# EAGLE board civ_if1 (EAGLE 7.7.0), part 1 of 2
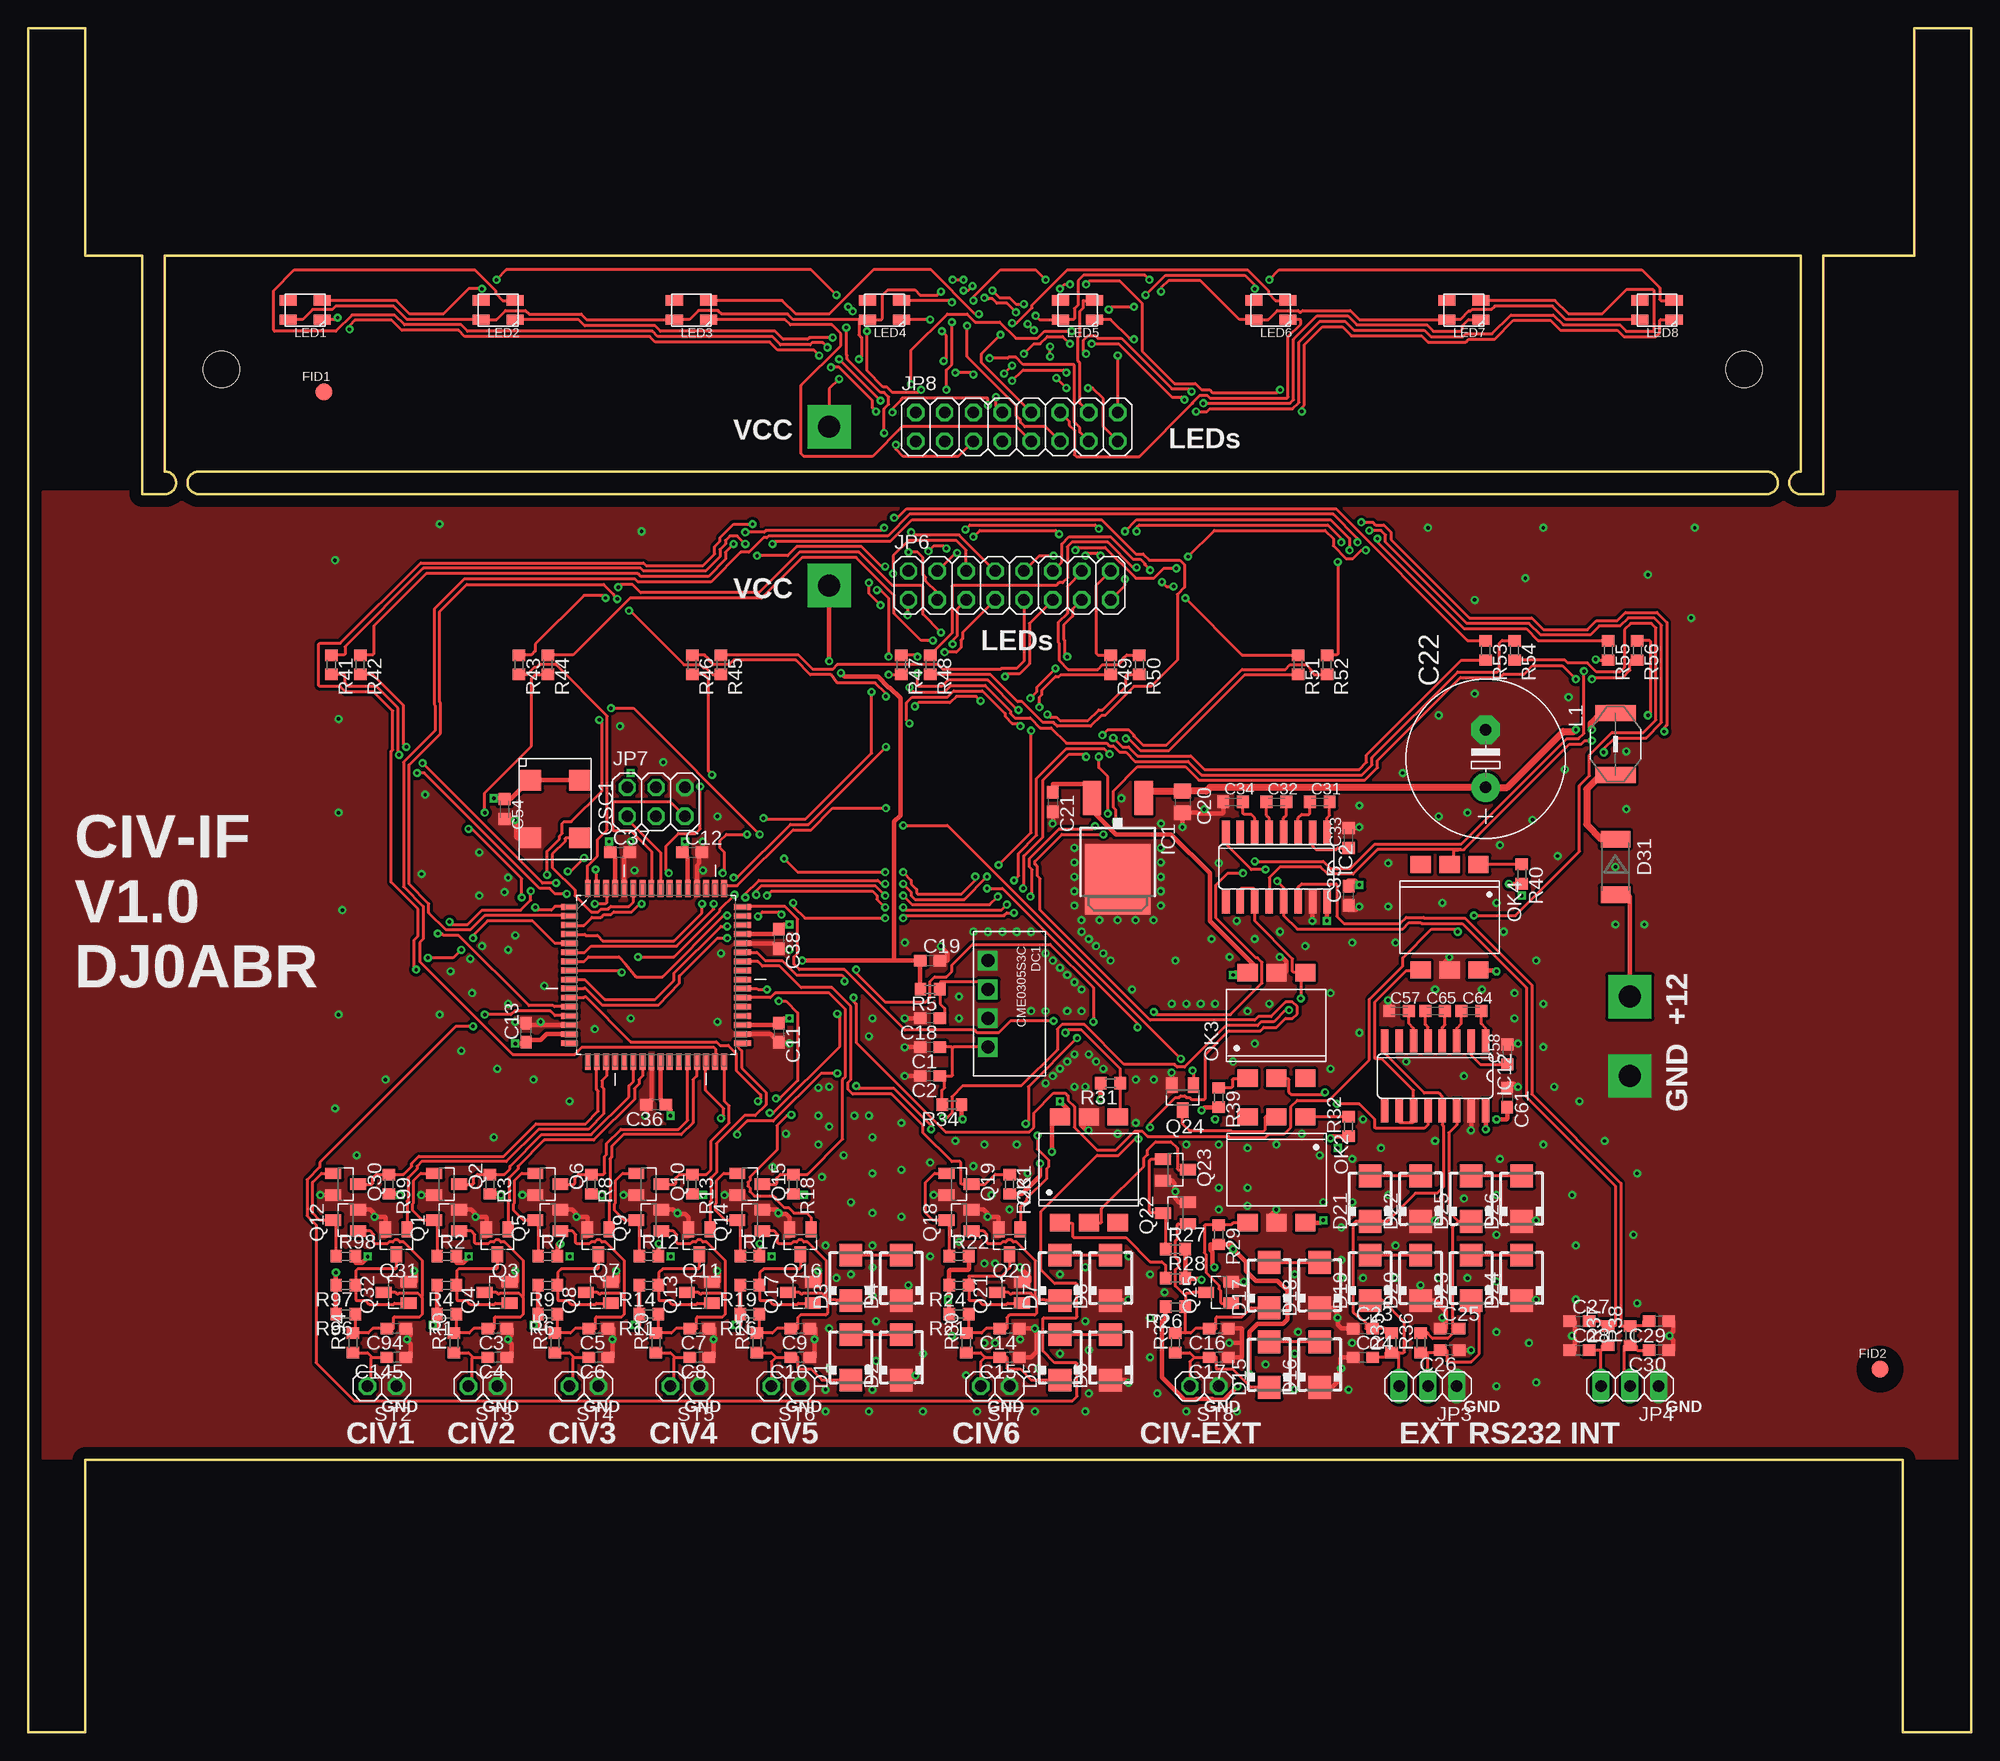
[diagram p0: board, top side]
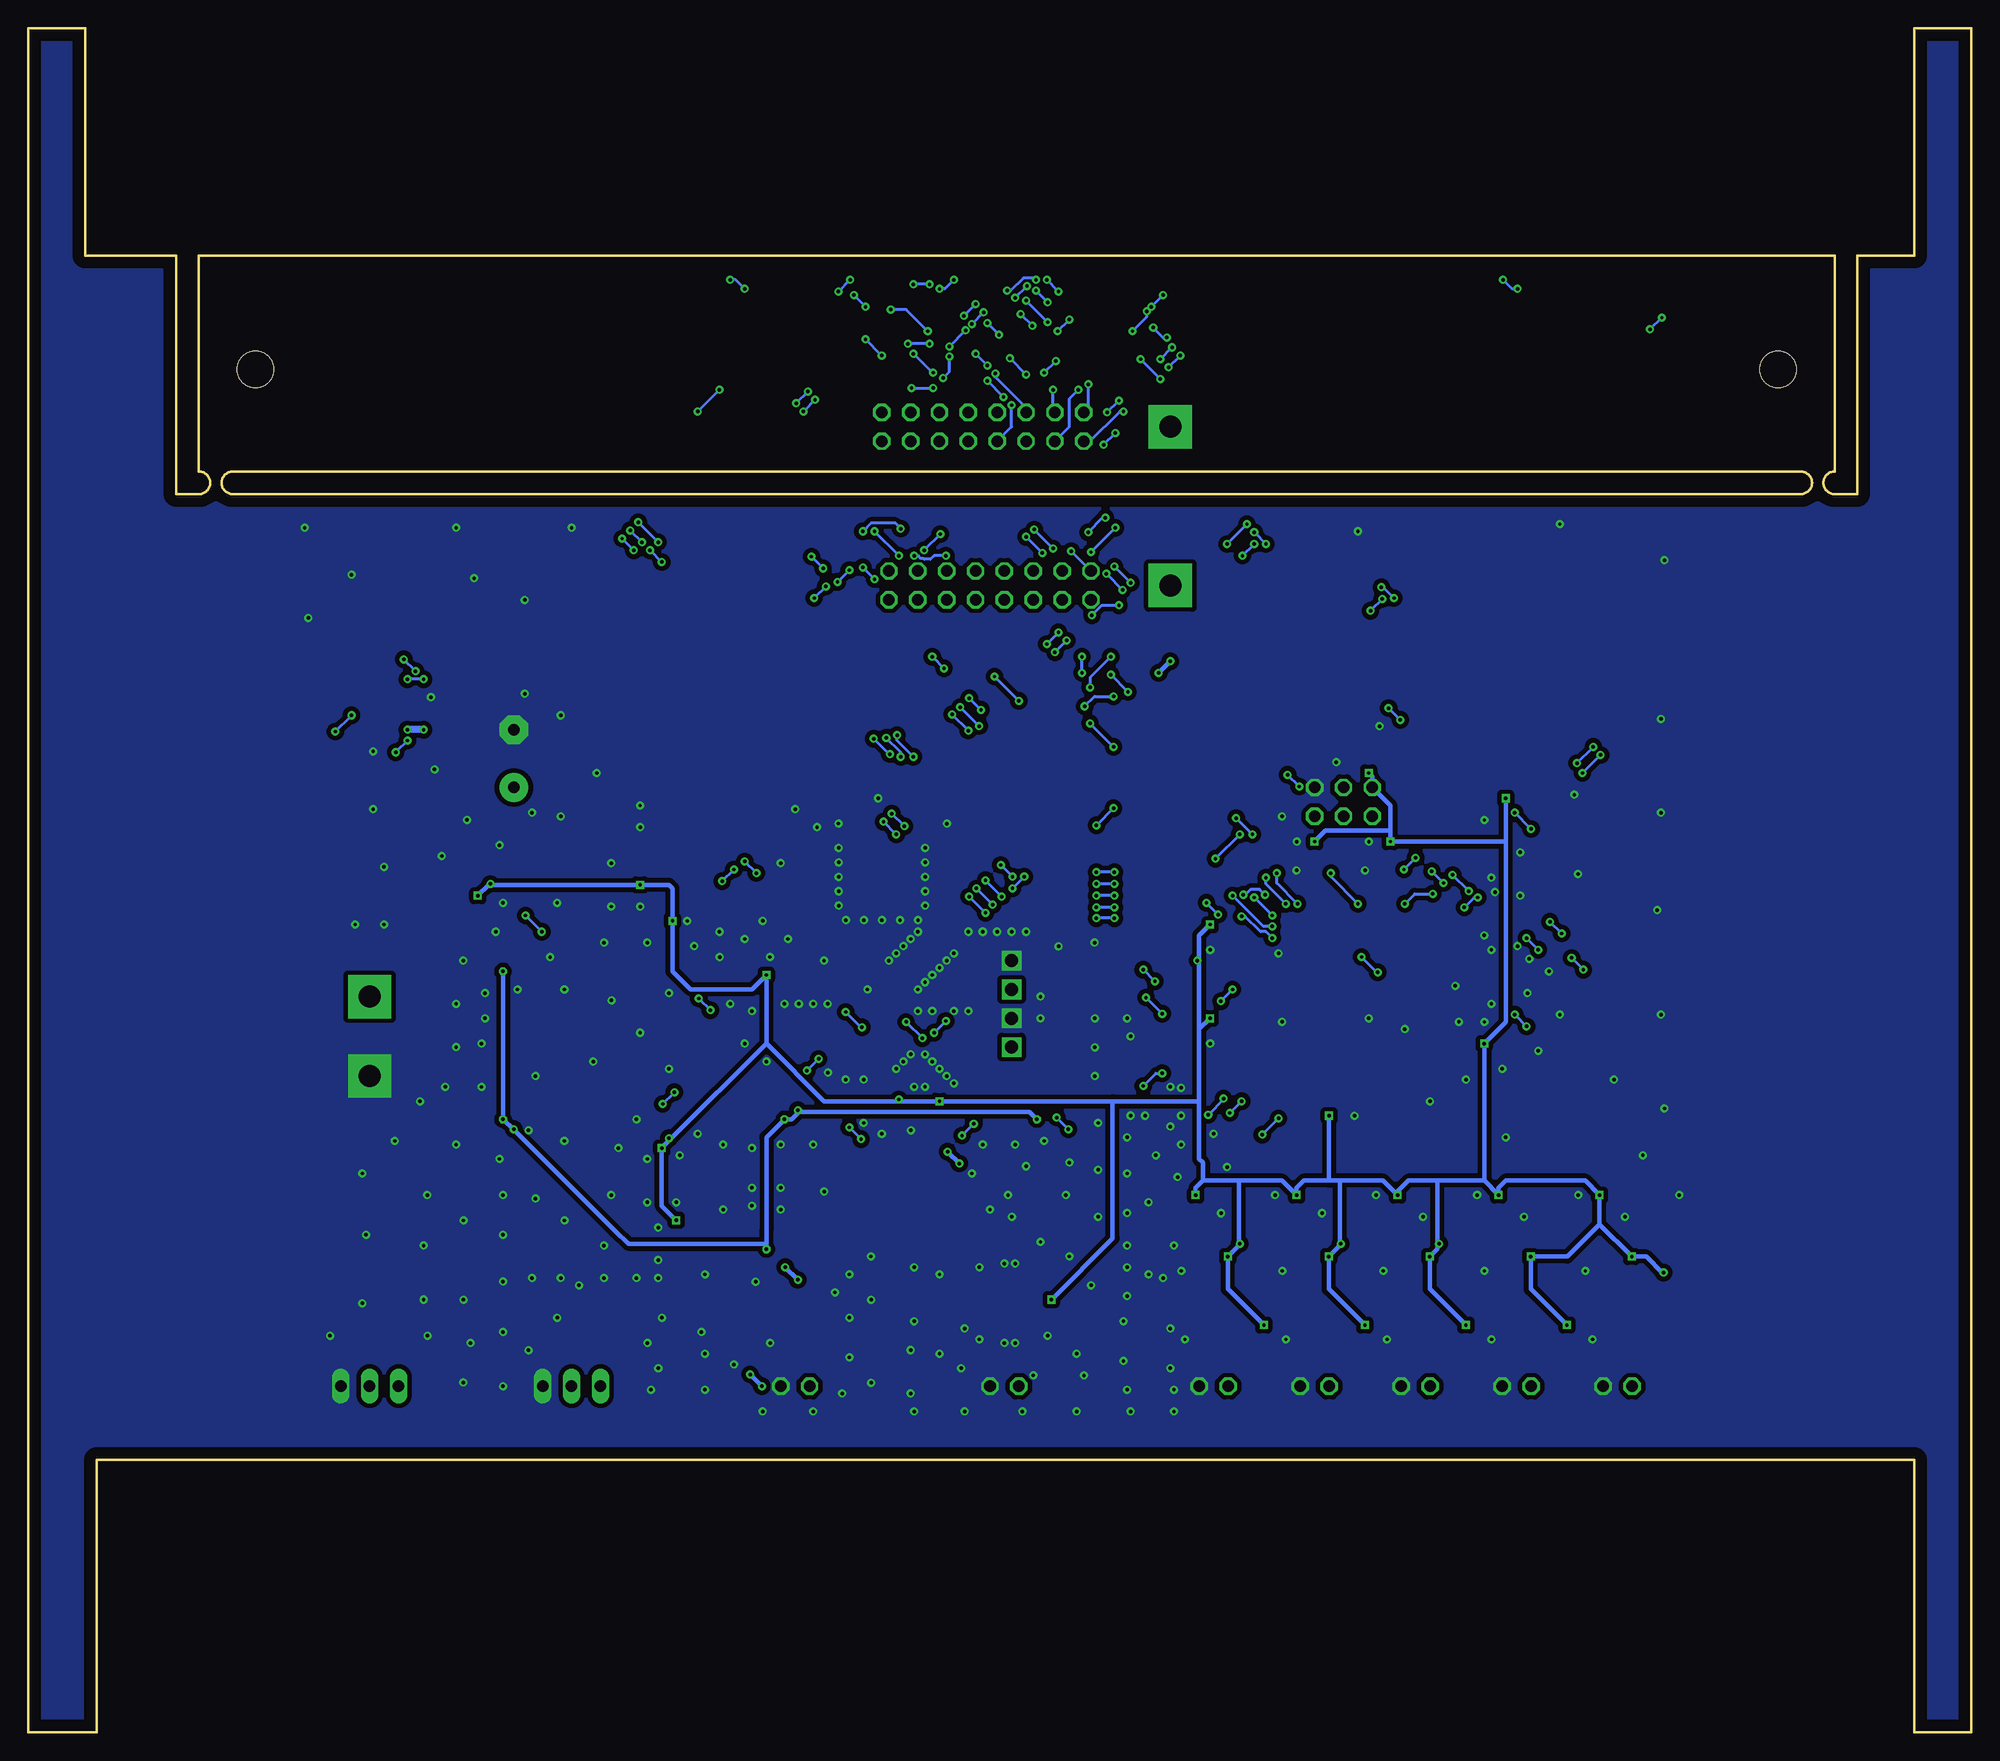
[diagram p1: board, bottom side, seen from below]

Size 171 x 150 mm. Coordinates in mm from the lower left corner, seen from the top.
Outline: 0,0 5,0 5,24 165,24 165,0 171,0 171,150 166,150 166,130 158,130 158,109 156,109 arc-180 156,111 156,130 12,130 12,111 arc-180 12,109 10,109 10,130 5,130 5,150 0,150 0,0
Outline: 153,111 15,111 arc180 15,109 153,109 arc180 153,111
Copper layers (1*16): Top 0.035mm / dielectric 1.5mm / Bottom 0.035mm
Design rules "default *": minimum track width 10mil, minimum drill 0.3mm, track to track 8mil, track to pad 8mil, pad to pad 8mil, via to via 8mil, smd to smd 0mil, copper to edge 40mil, drill to drill 8mil, minimum pad ring 10mil, minimum via ring 8mil, stop-mask expansion 4mil, vias tented up to drill 0.31mm, thermal gap 10mil
Net classes: 1 Supply: width 0.406 mm, drill 0.3 mm; 2 v12: width 0.61 mm, drill 0.3 mm
Holes 3.2 mm at 17,120 151,120

## Footprints (pad centres in the part's own frame; a part is rotated, then mirrored left to right if it is on the bottom)
C0603 = smd 1.1 x 1: 1 -0.85,0; 2 0.85,0
C0805 = smd 1.3 x 1.5: 1 -0.95,0; 2 0.95,0
E5-13 = drill 1.016 pad 2.54: + -2.54,0 | drill 1.016 pad 2.54 octagon: - 2.54,0
C0603K = smd 1.05 x 1.08: 1 -0.875,0; 2 0.875,0
SMA = smd 2 x 2: A 2,0; C -2,0
MELF = smd 1.45 x 2.6: 1 -2.445,0; 2 2.445,0
MURATA_DCDC = drill 1.15 square: 1 -3.81,0; 2 -1.27,0; 3 1.27,0; 4 3.81,0
FIDUCIAL = smd 1.5 x 1.5: P$1 0,0
DPACK = smd 1.6 x 3: 1 -2.28,-4.8; 3 2.28,-4.8 | smd 5.8 x 6.2: 4 0,2.38
SO16 = smd 0.66 x 2.032: 1 -4.445,-3.073; 2 -3.175,-3.073; 3 -1.905,-3.073; 4 -0.635,-3.073; 5 0.635,-3.073; 6 1.905,-3.073; 7 3.175,-3.073; 8 4.445,-3.073; 9 4.445,3.073; 10 3.175,3.073; 11 1.905,3.073; 12 0.635,3.073; 13 -0.635,3.073; 14 -1.905,3.073; 15 -3.175,3.073; 16 -4.445,3.073
THICKPIN = drill 1.93 pad 3.81 square: 1 0,0
1X03 = drill 1.016 long: 1 -2.54,0; 2 0,0; 3 2.54,0
2X08 = drill 1.016 octagon: 1 -8.89,-1.27; 2 -8.89,1.27; 3 -6.35,-1.27; 4 -6.35,1.27; 5 -3.81,-1.27; 6 -3.81,1.27; 7 -1.27,-1.27; 8 -1.27,1.27; 9 1.27,-1.27; 10 1.27,1.27; 11 3.81,-1.27; 12 3.81,1.27; 13 6.35,-1.27; 14 6.35,1.27; 15 8.89,-1.27; 16 8.89,1.27
2X03 = drill 1.016 octagon: 1 -2.54,-1.27; 2 -2.54,1.27; 3 0,-1.27; 4 0,1.27; 5 2.54,-1.27; 6 2.54,1.27
S = smd 1.4 x 3.56: 1 -2.73,0; 2 2.73,0
PLCC4_WE_LED = smd 1.5 x 0.9: 1 1.51,0.88; 2 1.51,-0.82; 3 -1.49,0.88; 4 -1.49,-0.82
DIL6-SMD = smd 1.78 x 1.52: 1 -2.54,-4.645; 2 0,-4.645; 3 2.54,-4.645; 4 2.54,4.645; 5 0,4.645; 6 -2.54,4.645
QOSC_AQO7015 = smd 1.8 x 2: 1 0,-0.318; 2 5.08,-0.318; 3 5.08,4.128; 4 0,4.128
SOT23 = smd 1 x 1.4: 1 -0.95,-1.1; 2 0.95,-1.1; 3 0,1.1
R0603 = smd 1 x 1.1: 1 -0.85,0; 2 0.85,0
PINHEAD1X2 = drill 1.016 octagon: 1 -1.27,0; 2 1.27,0
QFP80P1600X1600X120-64N = smd 1.473 x 0.508: 1 -7.62,5.994; 2 -7.62,5.207; 3 -7.62,4.394; 4 -7.62,3.607; 5 -7.62,2.794; 6 -7.62,2.007; 7 -7.62,1.194; 8 -7.62,0.406; 9 -7.62,-0.406; 10 -7.62,-1.194; 11 -7.62,-2.007; 12 -7.62,-2.794; 13 -7.62,-3.607; 14 -7.62,-4.394; 15 -7.62,-5.207; 16 -7.62,-5.994; 33 7.62,-5.994; 34 7.62,-5.207; 35 7.62,-4.394; 36 7.62,-3.607; 37 7.62,-2.794; 38 7.62,-2.007; 39 7.62,-1.194; 40 7.62,-0.406; 41 7.62,0.406; 42 7.62,1.194; 43 7.62,2.007; 44 7.62,2.794; 45 7.62,3.607; 46 7.62,4.394; 47 7.62,5.207; 48 7.62,5.994 | smd 0.508 x 1.473: 17 -5.994,-7.62; 18 -5.207,-7.62; 19 -4.394,-7.62; 20 -3.607,-7.62; 21 -2.794,-7.62; 22 -2.007,-7.62; 23 -1.194,-7.62; 24 -0.406,-7.62; 25 0.406,-7.62; 26 1.194,-7.62; 27 2.007,-7.62; 28 2.794,-7.62; 29 3.607,-7.62; 30 4.394,-7.62; 31 5.207,-7.62; 32 5.994,-7.62; 49 5.994,7.62; 50 5.207,7.62; 51 4.394,7.62; 52 3.607,7.62; 53 2.794,7.62; 54 2.007,7.62; 55 1.194,7.62; 56 0.406,7.62; 57 -0.406,7.62; 58 -1.194,7.62; 59 -2.007,7.62; 60 -2.794,7.62; 61 -3.607,7.62; 62 -4.394,7.62; 63 -5.207,7.62; 64 -5.994,7.62

## Placement (x,y rotation side)
C1  100n  [C0603]  79.38,60.33 180 top
C2  1u  [C0603]  79.38,57.78 180 top
C3  1n  [C0603]  41.27,35.56 180 top
C4  1n  [C0603]  41.27,33.02 180 top
C5  1n  [C0603]  50.16,35.56 180 top
C6  1n  [C0603]  50.16,33.02 180 top
C7  1n  [C0603]  59.05,35.56 180 top
C8  1n  [C0603]  59.05,33.02 180 top
C9  1n  [C0603]  67.94,35.56 180 top
C10  1n  [C0603]  67.94,33.02 180 top
C11  100n  [C0603]  66.04,61.59 270 top
C12  100n  [C0603]  58.42,77.47 0 top
C13  1u  [C0603]  43.81,61.59 90 top
C14  1n  [C0603]  86.36,35.56 180 top
C15  1n  [C0603]  86.36,33.02 180 top
C16  100p  [C0603]  104.78,35.56 180 top
C17  100p  [C0603]  104.78,33.02 180 top
C18  1u  [C0603]  79.38,62.87 180 top
C19  1u  [C0603]  79.38,67.94 0 top
C20  10u  [C0805]  101.6,81.92 270 top
C21  10u  [C0603]  90.17,81.92 270 top
C22  1000u/16  [E5-13]  128.27,85.72 90 top
C23  100p  [C0603]  117.47,35.56 0 top
C24  100p  [C0603]  117.47,33.02 0 top
C25  100p  [C0603]  125.09,35.56 0 top
C26  100p  [C0603]  125.09,33.66 180 top
C27  1n  [C0603]  136.53,36.2 0 top
C28  1n  [C0603]  136.53,33.66 0 top
C29  1n  [C0603]  143.51,36.2 180 top
C30  1n  [C0603]  143.51,33.66 180 top
C31  1u  [C0603K]  113.67,81.92 0 top
C32  1u  [C0603K]  109.86,81.92 0 top
C33  1u  [C0603K]  116.2,78.74 90 top
C34  1u  [C0603K]  106.05,81.92 0 top
C35  1u  [C0603]  116.2,73.66 90 top
C36  100n  [C0603]  55.24,55.24 180 top
C37  100n  [C0603]  52.07,77.47 0 top
C38  1u  [C0603]  66.04,69.85 270 top
C54  1u  [C0603K]  41.91,81.28 270 top
C57  1u  [C0603K]  120.65,63.5 0 top
C58  1u  [C0603K]  130.18,59.69 90 top
C61  1u  [C0603]  130.18,55.88 270 top
C64  1u  [C0603K]  127,63.5 0 top
C65  1u  [C0603K]  123.83,63.5 0 top
C94  1n  [C0603]  32.38,35.56 180 top
C145  1n  [C0603]  32.38,33.02 180 top
D1  SMBJ15A  [SMA]  72.39,33.02 90 top
D2  SMBJ15A  [SMA]  76.83,33.02 90 top
D3  SMBJ15A  [SMA]  72.39,40.01 90 top
D4  SMBJ15A  [SMA]  76.83,40.01 90 top
D5  SMBJ15A  [SMA]  90.81,33.02 90 top
D6  SMBJ15A  [SMA]  95.25,33.02 90 top
D7  SMBJ15A  [SMA]  90.81,40.01 90 top
D8  SMBJ15A  [SMA]  95.25,40.01 90 top
D15  SMBJ15A  [SMA]  109.22,32.38 90 top
D16  SMBJ15A  [SMA]  113.67,32.38 90 top
D17  SMBJ15A  [SMA]  109.22,39.37 90 top
D18  SMBJ15A  [SMA]  113.67,39.37 90 top
D19  SMBJ15A  [SMA]  118.11,40.01 90 top
D20  SMBJ15A  [SMA]  122.56,40.01 90 top
D21  SMBJ15A  [SMA]  118.11,46.99 90 top
D22  SMBJ15A  [SMA]  122.56,46.99 90 top
D23  SMBJ15A  [SMA]  127,40.01 90 top
D24  SMBJ15A  [SMA]  131.44,40.01 90 top
D25  SMBJ15A  [SMA]  127,46.99 90 top
D26  SMBJ15A  [SMA]  131.44,46.99 90 top
D31  1N4001  [MELF]  139.7,76.2 270 top
DC1  CME0305S3C  [MURATA_DCDC]  84.45,64.14 270 top
FID1  FIDUCIAL  [FIDUCIAL]  26,118 0 top
FID2  FIDUCIAL  [FIDUCIAL]  163,32 0 top
IC1  LF33CDT-DPAK  [DPACK]  95.89,77.47 180 top
IC2  MAX3232  [SO16]  109.86,76.2 180 top
IC12  MAX3232  [SO16]  123.83,57.78 180 top
JP1  [THICKPIN]  140.97,64.77 90 top
JP2  [THICKPIN]  140.97,57.78 90 top
JP3  [1X03]  123.19,30.48 180 top
JP4  [1X03]  140.97,30.48 180 top
JP5  [THICKPIN]  70.48,100.97 0 top
JP6  [2X08]  86.36,100.97 0 top
JP7  Program  [2X03]  55.24,81.92 0 top
JP8  [2X08]  87,114.94 0 top
JP9  [THICKPIN]  70.48,114.94 0 top
L1  WE74451147/47uH  [S]  139.7,87 270 top
LED1  RGBLED  [PLCC4_WE_LED]  24.36,125.24 180 top
LED2  RGBLED  [PLCC4_WE_LED]  41.37,125.24 180 top
LED3  RGBLED  [PLCC4_WE_LED]  58.37,125.24 180 top
LED4  RGBLED  [PLCC4_WE_LED]  75.36,125.24 180 top
LED5  RGBLED  [PLCC4_WE_LED]  92.36,125.24 180 top
LED6  RGBLED  [PLCC4_WE_LED]  109.36,125.24 180 top
LED7  RGBLED  [PLCC4_WE_LED]  126.36,125.24 180 top
LED8  RGBLED  [PLCC4_WE_LED]  143.37,125.24 180 top
OK1  H11L1SM  [DIL6-SMD]  93.34,49.53 0 top
OK2  H11L1SM  [DIL6-SMD]  109.86,49.53 180 top
OK3  H11L1SM  [DIL6-SMD]  109.86,62.23 0 top
OK4  H11L1SM  [DIL6-SMD]  125.09,71.75 180 top
OSC1  OSZ8MHz  [QOSC_AQO7015]  44.45,83.82 270 top
Q1  N-CH_MOSFET  [SOT23]  36.83,45.09 90 top
Q2  N-CH_MOSFET  [SOT23]  36.83,48.26 270 top
Q3  N-CH_MOSFET  [SOT23]  41.27,43.18 180 top
Q4  N-CH_MOSFET  [SOT23]  41.27,38.73 90 top
Q5  N-CH_MOSFET  [SOT23]  45.72,45.09 90 top
Q6  N-CH_MOSFET  [SOT23]  45.72,48.26 270 top
Q7  N-CH_MOSFET  [SOT23]  50.16,43.18 180 top
Q8  N-CH_MOSFET  [SOT23]  50.16,38.73 90 top
Q9  N-CH_MOSFET  [SOT23]  54.61,45.09 90 top
Q10  N-CH_MOSFET  [SOT23]  54.61,48.26 270 top
Q11  N-CH_MOSFET  [SOT23]  59.05,43.18 180 top
Q12  N-CH_MOSFET  [SOT23]  27.94,45.09 90 top
Q13  N-CH_MOSFET  [SOT23]  59.05,38.73 90 top
Q14  N-CH_MOSFET  [SOT23]  63.5,45.09 90 top
Q15  N-CH_MOSFET  [SOT23]  63.5,48.26 270 top
Q16  N-CH_MOSFET  [SOT23]  67.94,43.18 180 top
Q17  N-CH_MOSFET  [SOT23]  67.94,38.73 90 top
Q18  N-CH_MOSFET  [SOT23]  81.92,45.09 90 top
Q19  N-CH_MOSFET  [SOT23]  81.92,48.26 270 top
Q20  N-CH_MOSFET  [SOT23]  86.36,43.18 180 top
Q21  N-CH_MOSFET  [SOT23]  86.36,38.73 90 top
Q22  N-CH_MOSFET  [SOT23]  100.97,45.72 90 top
Q23  N-CH_MOSFET  [SOT23]  100.97,49.53 270 top
Q24  N-CH_MOSFET  [SOT23]  101.6,55.88 180 top
Q25  N-CH_MOSFET  [SOT23]  104.78,38.73 90 top
Q30  N-CH_MOSFET  [SOT23]  27.94,48.26 270 top
Q31  N-CH_MOSFET  [SOT23]  32.38,43.18 180 top
Q32  N-CH_MOSFET  [SOT23]  32.38,38.73 90 top
R1  10k  [R0603]  36.83,36.83 180 top
R2  10k  [R0603]  36.83,41.91 0 top
R3  10k  [R0603]  40.64,48.26 270 top
R4  10k  [R0603]  36.83,39.37 180 top
R5  1kOhm-Ferr  [R0603]  79.38,65.41 180 top
R6  10k  [R0603]  45.72,36.83 180 top
R7  10k  [R0603]  45.72,41.91 0 top
R8  10k  [R0603]  49.53,48.26 270 top
R9  10k  [R0603]  45.72,39.37 180 top
R10  1kOhm-Ferr  [R0603]  37.47,34.29 90 top
R11  10k  [R0603]  54.61,36.83 180 top
R12  10k  [R0603]  54.61,41.91 0 top
R13  10k  [R0603]  58.42,48.26 270 top
R14  10k  [R0603]  54.61,39.37 180 top
R15  1kOhm-Ferr  [R0603]  46.35,34.29 90 top
R16  10k  [R0603]  63.5,36.83 180 top
R17  10k  [R0603]  63.5,41.91 0 top
R18  10k  [R0603]  67.31,48.26 270 top
R19  10k  [R0603]  63.5,39.37 180 top
R20  1kOhm-Ferr  [R0603]  55.24,34.29 90 top
R21  10k  [R0603]  81.92,36.83 180 top
R22  10k  [R0603]  81.92,41.91 0 top
R23  10k  [R0603]  86.36,48.26 270 top
R24  10k  [R0603]  81.92,39.37 180 top
R25  1kOhm-Ferr  [R0603]  64.14,34.29 90 top
R26  10k  [R0603]  100.97,37.47 180 top
R27  10k  [R0603]  100.97,42.55 0 top
R28  680  [R0603]  100.97,40.01 0 top
R29  1k  [R0603]  104.78,43.81 270 top
R30  1kOhm-Ferr  [R0603]  82.55,34.29 90 top
R31  1k  [R0603]  95.25,57.15 180 top
R32  330  [R0603]  116.2,53.34 90 top
R33  1kOhm-Ferr  [R0603]  100.97,34.29 90 top
R34  1kOhm-Ferr  [R0603]  81.28,55.24 180 top
R35  1kOhm-Ferr  [R0603]  120.02,34.29 90 top
R36  1kOhm-Ferr  [R0603]  122.56,34.29 90 top
R37  1kOhm-Ferr  [R0603]  139.06,34.92 90 top
R38  1kOhm-Ferr  [R0603]  140.97,34.92 90 top
R39  680  [R0603]  104.78,55.88 270 top
R40  330  [R0603]  131.44,75.56 270 top
R41  2k2  [R0603]  26.67,93.98 270 top
R42  680  [R0603]  29.21,93.98 270 top
R43  2k2  [R0603]  43.18,93.98 270 top
R44  680  [R0603]  45.72,93.98 270 top
R45  2k2  [R0603]  60.96,93.98 270 top
R46  680  [R0603]  58.42,93.98 270 top
R47  2k2  [R0603]  76.83,93.98 270 top
R48  680  [R0603]  79.38,93.98 270 top
R49  2k2  [R0603]  95.25,93.98 270 top
R50  680  [R0603]  97.79,93.98 270 top
R51  2k2  [R0603]  111.76,93.98 270 top
R52  680  [R0603]  114.3,93.98 270 top
R53  2k2  [R0603]  128.27,95.25 270 top
R54  680  [R0603]  130.81,95.25 270 top
R55  2k2  [R0603]  139.06,95.25 270 top
R56  680  [R0603]  141.6,95.25 270 top
R94  1kOhm-Ferr  [R0603]  28.57,34.29 90 top
R96  10k  [R0603]  27.94,36.83 180 top
R97  10k  [R0603]  27.94,39.37 180 top
R98  10k  [R0603]  27.94,41.91 0 top
R99  10k  [R0603]  31.75,48.26 270 top
ST2  [PINHEAD1X2]  31.11,30.48 180 top
ST3  [PINHEAD1X2]  40.01,30.48 180 top
ST4  [PINHEAD1X2]  48.9,30.48 180 top
ST5  [PINHEAD1X2]  57.78,30.48 180 top
ST6  [PINHEAD1X2]  66.67,30.48 180 top
ST7  [PINHEAD1X2]  85.09,30.48 180 top
ST8  [PINHEAD1X2]  103.5,30.48 180 top
U1  ATXMEGA256A3-AU  [QFP80P1600X1600X120-64N]  55.24,66.67 0 top

## Library data of the parts
C1-C38 C54 C57 C58 C61 C64 C65 C94 C145 R1-R56 R94 R96-R99 = rcl
D1-D8 D15-D26 D31 DC1 FID1 FID2 JP1 JP2 JP5 JP9 LED1-LED8 OSC1 Q1-Q25 Q30-Q32 ST2-ST8 = km
IC1 = v-reg
IC2 IC12 = maxim; MPN: MAX3232CSE; OC_FARNELL: 9725490; OC_NEWARK: 90C2890
JP3 JP4 JP6-JP8 = pinhead
L1 = WE-PD3; MPN: 74451147; OC_FARNELL: 1636065; OC_NEWARK: 08P2637; PACKAGE: Type S; SUPPLIER: Würth Elektronik eiSos GmbH
OK1-OK4 = optocoupler; OC_FARNELL: unknown; OC_NEWARK: unknown
U1 = ATXMEGA256A3-AU; DESCRIPTION: MCU; MPN: ATXMEGA256A3-AU; OC_FARNELL: 1748554; OC_NEWARK: -; PACKAGE: QFP-64; SUPPLIER: Atmel

## Nets
GND [Supply]: C1.2 C2.2 C3.1 C4.1 C5.1 C6.1 C7.1 C8.1 C9.1 C10.1 C11.2 C12.2 C13.2 C14.1 C15.1 C16.1 C17.1 C18.2 C19.2 C20.2 C21.2 C22.- C23.1 C24.1 C25.1 C26.1 C27.1 C28.1 C29.1 C30.1 C33.2 C34.1 C35.1 C36.2 C37.2 C38.2 C54.2 C57.1 C58.2 C61.1 C94.1 C145.1 D2.C D4.C D6.C D8.C D16.C D18.C D20.C D22.C D24.C D26.C DC1.1 DC1.3 IC1.4 IC2.15 IC12.15 JP2.1 JP3.1 JP4.1 JP7.6 OK1.5 OK2.5 OK3.5 OK4.5 OSC1.2 Q1.2 Q2.2 Q3.2 Q4.2 Q5.2 Q6.2 Q7.2 Q8.2 Q9.2 Q10.2 Q11.2 Q12.2 Q13.2 Q14.2 Q15.2 Q16.2 Q17.2 Q18.2 Q19.2 Q20.2 Q21.2 Q22.2 Q23.2 Q24.2 Q25.2 Q30.2 Q31.2 Q32.2 ST2.1 ST3.1 ST4.1 ST5.1 ST6.1 ST7.1 ST8.1 U1.14 U1.24 U1.34 U1.44 U1.52 U1.60
N$1: OK1.2 Q23.3
N$2: Q1.3 Q2.1 R2.1
N$3: OSC1.3 U1.59
N$4: C1.1 C2.1 DC1.4 R34.2
N$5: Q3.3 Q4.1 R4.1
N$6: C18.1 DC1.2 R5.1
N$7: C4.2 R10.1 ST3.2
N$8: OK2.1 R32.2
N$9: Q5.3 Q6.1 R7.1
N$10: C94.2 Q12.1 Q32.3 R94.2 R96.1
N$11: C3.2 Q1.1 Q4.3 R1.1 R10.2
N$12: Q7.3 Q8.1 R9.1
N$13: C6.2 R15.1 ST4.2
N$14: C5.2 Q5.1 Q8.3 R6.1 R15.2
N$15: C8.2 R20.1 ST5.2
N$16: Q9.3 Q10.1 R12.1
N$17: Q22.3 Q23.1 R27.1
N$18: OK2.4 Q25.1 R29.1
N$19: Q11.3 Q13.1 R14.1
N$20 [v12]: C20.1 C22.+ IC1.1 L1.1
N$21: C7.2 Q9.1 Q13.3 R11.1 R20.2
N$22: C10.2 D1.C R25.1 ST6.2
N$23: Q14.3 Q15.1 R17.1
N$24: C9.2 D3.C Q14.1 Q17.3 R16.1 R25.2
N$25: C15.2 D5.C R30.1 ST7.2
N$26: Q16.3 Q17.1 R19.1
N$27: JP6.1 R41.1
N$28: C14.2 D7.C Q18.1 Q21.3 R21.1 R30.2
N$29: C17.2 D15.C R33.1 ST8.2
N$30: Q18.3 Q19.1 R22.1
N$31: C16.2 D17.C Q22.1 Q25.3 R26.1 R33.2
N$32: JP6.3 R42.1
N$33: Q20.3 Q21.1 R24.1
N$34 [Supply]: D31.2 JP1.1
N$35: D15.A D16.A
N$36: D17.A D18.A
N$37: C24.2 D19.C JP3.3 R35.1
N$38: C23.2 D21.C IC12.8 IC12.13 R35.2
N$39: D19.A D20.A
N$40: D21.A D22.A
N$41: C26.2 D23.C JP3.2 R36.1
N$42: C28.2 JP4.3 R37.1
N$43: D23.A D24.A
N$44: D25.A D26.A
N$45: C64.1 IC12.3
N$46: C64.2 IC12.1
N$47: C65.2 IC12.4
N$48: C65.1 IC12.5
N$49: C58.1 IC12.2
N$50: C57.2 IC12.6
N$51: IC12.10 IC12.11 OK4.4
N$52: IC12.12 OK3.2
N$53: C27.2 IC2.8 IC2.13 R37.2
N$54: C25.2 D25.C IC12.14 R36.2
N$55: JP6.5 R43.1
N$56: JP6.7 R44.1
N$57: C30.2 JP4.2 R38.1
N$58: JP6.9 R45.1
N$59: JP6.11 R46.1
N$60: C31.1 IC2.3
N$61: C31.2 IC2.1
N$62: C32.2 IC2.4
N$63: C32.1 IC2.5
N$64: C33.1 IC2.2
N$65: C34.2 IC2.6
N$66: IC2.10 IC2.11 OK3.4 U1.30
N$67: IC2.12 OK4.2 U1.31
N$68: C29.2 IC2.14 R38.2
N$69: JP6.13 R47.1
N$70: OK3.1 R39.1
N$71: OK4.1 R40.1
N$72: JP6.15 R48.1
N$73: JP6.16 R49.1
N$74: JP6.14 R50.1
N$75: JP6.12 R51.1
N$76: JP6.10 R52.1
N$77: JP6.8 R53.1
N$78: JP6.6 R54.1
N$79: JP6.4 R55.1
N$80: JP6.2 R56.1
N$81: R41.2 U1.62
N$82: R42.2 U1.63
N$83: R43.2 U1.64
N$84: R44.2 U1.1
N$85: R45.2 U1.2
N$86: R46.2 U1.3
N$87: R47.2 U1.4
N$88: R48.2 U1.5
N$89: R49.2 U1.6
N$90: R50.2 U1.7
N$91: R51.2 U1.8
N$92: R52.2 U1.9
N$93: R53.2 U1.10
N$94: R54.2 U1.11
N$95 [v12]: D31.1 L1.2
N$96: R55.2 U1.12
N$97: R56.2 U1.13
N$98: D1.A D2.A
N$99: Q12.3 Q30.1 R98.1
N$100: JP7.5 U1.57
N$101: JP7.1 U1.56
N$102: D3.A D4.A
N$103: D5.A D6.A
N$104: D7.A D8.A
N$105: Q31.3 Q32.1 R97.1
N$106: C145.2 R94.1 ST2.2
N$107: OK2.2 Q24.3
N$108: JP9.1 LED1.1 LED2.1 LED3.1 LED4.1 LED5.1 LED6.1 LED7.1 LED8.1
N$109: JP8.1 LED1.3
N$110: JP8.3 LED1.4
N$111: JP8.5 LED2.3
N$112: JP8.7 LED2.4
N$113: JP8.9 LED3.3
N$114: JP8.11 LED3.4
N$115: JP8.13 LED4.3
N$116: JP8.15 LED4.4
N$117: JP8.16 LED5.3
N$118: JP8.14 LED5.4
N$119: JP8.12 LED6.3
N$120: JP8.10 LED6.4
N$121: JP8.8 LED7.3
N$122: JP8.6 LED7.4
N$123: JP8.4 LED8.3
N$124: JP8.2 LED8.4
PLUS-CIV [Supply]: C61.2 IC12.16 OK4.6 R26.2 R27.2 R28.2 R29.2 R34.1 R39.2
UART1: Q30.3 R99.1 U1.18
UART2: Q31.1 U1.19
UART3: Q2.3 R3.1 U1.22
UART4: Q3.1 U1.23
UART5: Q6.3 R8.1 U1.28
UART6: Q7.1 U1.29
UART7: Q10.3 R13.1 U1.32
UART8: Q11.1 U1.33
UART9: Q15.3 R18.1 U1.38
UART10: Q16.1 U1.39
UART11: Q19.3 R23.1 U1.42
UART12: Q20.1 U1.43
UART13: OK1.4 R31.1 U1.48
UART14: Q24.1 U1.49
UART15: OK1.1 R28.1
VCC [Supply]: C11.1 C12.1 C13.1 C19.1 C21.1 C35.2 C36.1 C37.1 C38.1 C54.1 IC1.3 IC2.16 JP5.1 JP7.2 OK1.6 OK2.6 OK3.6 OSC1.1 OSC1.4 R1.2 R2.2 R3.2 R4.2 R5.2 R6.2 R7.2 R8.2 R9.2 R11.2 R12.2 R13.2 R14.2 R16.2 R17.2 R18.2 R19.2 R21.2 R22.2 R23.2 R24.2 R31.2 R32.1 R40.2 R96.2 R97.2 R98.2 R99.2 U1.15 U1.25 U1.35 U1.45 U1.53 U1.61

## Tracks (layer width: path | path; a pad name or v marks a point on that pad's centre or on a via)
GND  (via drill 0.3)
  Top 0.406: U1.60 52.45,77 C37.2 53.01,77.56 v53.01,78.41 | U1.52 58.85,76.31 59.05,76.52 59.05,77.25 C12.2 59.35,77.56 v59.35,78.41 | U1.44 65.57,69.47 C38.2 66.15,68.89 v66.97,68.89 | U1.34 65.32,61.47 C11.2 66.89,60.74 66.99,60.64 66.98,60.64 v66.97,60.63 | U1.24 54.84,55.69 C36.2 54.4,54.4 v54.27,54.28 | U1.14 43.98,62.28 C13.2 43.72,62.54 v42.84,62.54 | C34.1 105.17,80.96 105.09,80.88 102.95,80.88 102.87,80.96 C20.2 101.6,79.69 v101.58,79.68 | C15.1 88.27,33.02 88.74,33.5 88.74,35.24 88.42,35.56 C14.1 87.31,35.4 87.31,34.61 v87.3,34.6 | C17.1 106.76,33.02 106.84,33.1 106.84,34.29 | 106.84,34.29 106.84,35.48 106.76,35.56 C16.1 | OK2.5 109.86,44.85 109.38,44.85 109.38,45.56 109.78,45.96 v109.84,46.03 | C54.2 42.7,80.41 42.78,80.33 v42.84,80.32 42.94,80.17 42.94,78.82 43.02,78.74 OSC1.2 | C57.1 119.78,64.29 119.7,64.37 v119.68,64.44 | C58.2 131.05,60.56 v131.11,60.63 | C33.2 117.08,79.61 v117.14,79.68 | C145.1 33.66,33.02 33.66,34.21 33.34,34.53 v33.32,34.6 33.42,34.77 33.66,35 33.66,35.56 C94.1 | C4.1 42.55,33.02 42.55,34.21 42.23,34.53 v42.21,34.6 42.31,34.77 42.55,35 42.55,35.56 C3.1 | C6.1 51.44,33.02 51.44,34.53 v51.42,34.6 51.51,34.77 51.51,35.56 C5.1 | C8.1 60.33,33.02 60.33,34.53 v60.31,34.6 60.4,34.77 60.4,35.56 C7.1 | C10.1 69.22,33.02 69.22,34.53 v69.2,34.6 69.29,34.77 69.29,35.56 C9.1 | C2.2 77.15,57.78 v77.14,57.78 | C1.2 77.15,60.33 v77.14,60.32 | C18.2 77.15,62.87 v77.14,62.86 | C19.2 80.88,67.94 80.88,68.58 80.33,69.14 v80.31,69.21 | C24.1 115.57,33.02 115.49,32.94 115.49,32.07 v115.55,32.06 115.41,31.91 115.41,31.04 114.78,30.4 113.67,30.4 D16.C
  Top 0.406: C23.1 115.57,35.56 115.25,35.88 115.25,36.43 v115.23,36.5 115.17,36.67 115.17,36.99 114.78,37.39 113.67,37.39 D18.C | C26.1 126.92,33.66 v126.98,33.65 | C25.1 124.78,35.56 124.78,36.12 124.46,36.43 v124.44,36.5 124.78,36.35 124.78,37.07 123.83,38.02 122.56,38.02 D20.C | C28.1 136.13,33.66 136.13,34.61 135.89,34.85 v135.87,34.92 135.97,35.08 136.13,35.24 136.13,36.2 C27.1 | C21.2 90.17,80.01 v90.15,80 | C30.1 144.78,33.66 144.78,34.53 144.46,34.85 v144.44,34.92 144.54,35.08 144.78,35.32 144.78,36.2 C29.1 | C35.1 116.2,72.39 116.84,72.39 117.08,72.63 v117.14,72.7 | C61.1 130.18,57.15 130.73,57.15 131.05,56.83 v131.11,56.82 | Q30.2 25.72,47.31 v25.7,47.3 | Q32.2 33.5,39.69 34.13,39.69 34.13,40.4 33.97,40.56 v33.95,40.63 | Q12.2 30.08,46.04 30.4,45.72 30.4,45.4 v30.46,45.39 30.64,45.4 31.35,45.4 31.43,45.32 Q31.2 | Q4.2 43.02,39.69 43.02,40.4 42.86,40.56 v42.84,40.63 | Q1.2 37.94,46.04 38.97,46.04 39.29,45.72 39.29,45.4 v39.35,45.39 39.53,45.4 40.24,45.4 40.32,45.32 Q3.2 | Q2.2 34.61,47.31 v34.59,47.3 | Q6.2 43.5,47.31 v43.48,47.3 | Q8.2 51.91,39.69 51.91,40.4 51.75,40.56 v51.73,40.63 | Q5.2 46.83,46.04 47.86,46.04 48.18,45.72 48.18,45.4 v48.24,45.39 48.42,45.4 49.13,45.4 49.21,45.32 Q7.2 | Q13.2 60.8,39.69 60.8,40.4 60.64,40.56 v60.62,40.63 | Q9.2 56.75,46.04 57.07,45.72 v57.13,45.71 57.31,45.64 57.78,45.64 58.1,45.32 Q11.2 | Q10.2 52.39,47.31 v52.37,47.3 | Q15.2 61.28,47.31 v61.26,47.3 | Q17.2 69.06,39.69 69.69,39.69 69.69,40.4 69.53,40.56 v69.52,40.63 | Q14.2 64.61,46.04 65.88,46.04 66.12,45.8 66.04,45.72 v66.02,45.71 66.2,45.64 66.67,45.64 66.99,45.32 Q16.2
  Top 0.406: Q19.2 80.8,47.31 79.69,47.31 v79.67,47.3 | Q21.2 87.47,39.69 88.11,39.69 88.11,40.08 87.31,40.88 v87.3,40.95 | Q18.2 84.06,46.04 84.38,45.72 84.38,45.4 v84.44,45.39 84.61,45.4 85.33,45.4 85.41,45.32 Q20.2 | Q25.2 106.92,39.69 v106.98,39.68 | Q22.2 102,46.67 101.28,46.67 100.97,46.99 100.97,47.55 v100.95,47.62 100.89,47.78 100.89,48.34 100.65,48.58 99.93,48.58 Q23.2 | Q24.2 100.65,58.02 v100.63,58.09 | OK1.5 93.34,54.21 92.63,54.21 92.63,53.5 93.19,52.94 93.27,52.94 v93.33,53.01 | OK3.5 109.86,66.91 110.65,66.91 110.73,66.99 110.73,67.87 110.25,68.34 110.17,68.26 v110.16,68.25 | OK4.5 125.09,67.07 124.62,67.07 124.62,67.79 125.02,68.18 v125.08,68.25 | D2.C 76.83,31.04 77.95,31.04 78.03,31.11 78.03,31.35 v78.09,31.42 | D4.C 76.83,38.02 77.47,38.02 77.47,39.29 v77.45,39.36 | D6.C 95.25,31.04 96.52,31.04 96.76,30.8 v96.82,30.79 | D8.C 95.25,38.02 96.76,38.02 v96.82,38.09 | D24.C 131.44,38.02 132.64,38.02 v132.7,38.09 | D22.C 122.56,45.01 123.75,45.01 v123.81,45.08 | D26.C 131.44,45.01 132.64,45.01 v132.7,45.08 | IC12.15 127,53.02 v126.98,53.01 | IC2.15 113.03,71.44 v113.01,71.43 | 106.84,34.29 105.73,34.29 v105.71,34.28
  Bottom 0.406: 109.86,46.04 v109.84,46.03
  other vias: 92.69,71.51 94.28,71.51 95.87,71.51 97.45,71.51 99.04,71.51 99.68,72.78 99.68,74.05 99.68,75.32 99.68,76.59 99.68,77.86 92.06,72.78 92.06,74.05 92.06,75.32 92.06,76.59 92.06,77.86 116.5,34.28 122.54,39.36 92.71,70.48 93.34,69.85 93.98,69.22 94.61,68.58 95.25,67.94 89.53,68.58 90.17,67.94 90.81,67.31 91.44,66.67 92.08,66.04 92.71,65.41 88.27,70.48 87,70.48 85.72,70.48 84.45,70.48 83.19,70.48 81.92,64.77 81.92,62.87 92.71,63.5 91.44,63.5 89.53,63.5 88.27,63.5 89.53,57.15 90.17,57.78 90.81,58.42 91.44,59.05 92.08,59.69 93.34,59.69 93.98,59.05 94.61,58.42 93.03,56.83 92.08,56.83 95.89,52.7 97.47,53.66 100.65,64.14 101.92,64.14 103.19,64.14 104.46,64.14 105.73,68.26 104.14,69.85 97.16,65.41 100.97,67.94 107.31,63.5 109.22,64.14 106.36,71.44 107.95,69.85 97.47,57.47 99.06,57.47 101.92,51.75 104.78,51.75 107.31,51.44 109.86,51.75 112.08,52.7 113.67,50.8 107.31,47.94 104.78,47.94 104.78,46.04 107.31,46.35 113.98,46.67 116.52,46.67 116.52,50.48 115.57,44.45 115.57,41.59 115.57,40.01 117.47,40.01 111.44,40.32 111.76,35.24 111.44,33.34 108.9,32.38 111.44,30.16 116.2,30.16 96.84,41.91 98.74,40.32 100.01,38.73 98.74,36.51 98.74,33.02 99.38,29.84 93.34,29.84 93.34,33.66 93.03,36.2 93.03,40.96 90.81,40.32 90.81,33.34 88.9,32.07 88.58,35.56 84.14,34.29 85.09,34.29 81.6,52.07 84.14,51.75 87,51.75 87.95,49.21 83.19,49.85 84.77,47.31 86.36,46.04 85.09,41.27 84.14,41.27 81.92,43.18 72.71,54.29 73.98,54.29 71.75,50.8 69.85,48.9 74.3,52.39 74.3,49.21 74.3,45.72 74.3,42.86 74.3,40.96 74.61,36.2 74.3,38.42 72.39,40.32 71.12,40.01 70.17,42.86 72.39,46.67 76.83,53.66 76.83,49.53 76.83,45.4 79.38,41.91 79.38,50.16 70.48,35.56 70.48,32.07 70.17,30.16 74.3,30.16 70.17,28.26 73.98,28.26 78.74,28.26 82.55,31.43 81.28,34.92 74.61,32.7 78.74,33.34 83.5,28.26 88.58,28.26 93.03,28.26 101.92,28.26 106.36,28.26 119.06,51.44 123.83,52.07 129.54,50.48 129.22,47.31 129.22,43.81 129.22,39.69 124.14,40.01 126.68,40.01 126.36,46.99 119.7,47.31 120.33,42.86 120.33,40.01 129.22,35.24 129.22,30.48 132.72,30.8 132.08,34.29 136.21,38.1 136.21,42.86 135.89,47.31 133.35,51.75 141.6,37.78 141.29,43.81 141.6,49.21 138.75,52.07 136.53,55.56 134.3,56.83 133.35,60.33 133.35,64.14 132.72,67.94 129.86,70.48 129.22,73.03 124.46,73.03 119.7,72.71 139.7,71.12 142.24,71.12 139.7,76.2 110.17,70.48 112.39,69.22 116.52,69.53 120.33,69.53 117.16,61.59 107.95,60.64 106.05,59.05 114.62,65.09 114.62,58.42 117.47,53.98 121.28,59.05 126.36,57.78 123.83,65.41 127.95,65.41 130.81,65.09 130.81,62.87 126.68,80.96 124.14,80.64 119.7,76.52 129.54,78.11 135.25,84.77 134.62,77.15 135.57,91.12 127.32,91.44 120.97,84.45 140.65,86.36 140.65,81.28 123.19,106.05 133.35,106.05 146.69,106.05 131.76,101.6 142.56,101.92 146.37,98.11 127.32,99.69 53.98,105.73 36.2,106.36 26.99,103.19 27.3,89.22 27.3,80.96 27.62,72.39 27.3,63.18 26.99,54.93 47.62,55.56 44.45,57.47 41.27,58.42 40.96,52.39 28.89,50.8 38.1,60.01 36.2,63.18 31.43,57.47 42.23,75.25 41.91,73.98 39.69,73.66 39.69,77.47 34.92,82.55 34.61,75.56 39.93,69.22 42.23,68.9 42.86,70.17 45.4,65.72 42.23,64.14 39.05,65.09 37.15,66.99 69.53,56.75 70.48,56.83 69.53,54.29 70.48,53.34 69.53,51.75 66.67,52.7 65.48,49.77 73.98,61.28 74.3,62.87 77.15,69.53 60.96,68.58 60.64,62.55 53.02,62.87 49.85,61.91 45.09,62.55 52.07,88.58 55.88,85.41 60.64,80.64 59.37,75.88 53.34,75.88 96.2,82.23 99.69,80.01 104.78,76.52 103.5,81.28 124.14,89.53 132.4,80.33 117.16,81.6 38.89,68.1
  pour Bottom (isolate 0.406, no thermals): 0,150 171,150 171,0 0,0
  pour Top (no thermals): 100.33,78.42 91.44,78.42 91.44,70.8 100.33,70.8
  pour Top (isolate 0.254, no thermals): 1.27,109.22 170.81,109.22 170.81,24.13 1.27,24.13
N$1
  Top 0.254: Q23.3 101.2,49.53 101.12,49.61 101.12,51.44 100.57,51.99 99.22,51.99 98.5,51.28 98.5,50.88 98.19,50.56 98.19,49.85 94.46,46.12 94.46,44.93 94.38,44.85 93.34,44.85 OK1.2
N$2
  Top 0.254: R2.1 35.96,41.91 35.96,45.09 Q1.3 34.69,45.09 33.81,45.96 33.81,46.51 33.89,46.59 33.89,48.58 34.53,49.21 Q2.1
N$3
  Top 0.254: OSC1.3 47.31,78.74 47.23,78.66 47.23,78.42 46.12,77.31 46.12,76.12 48.1,74.14 48.1,73.66 49.53,72.23 50.16,72.23 50.4,72.47 51.04,72.47 51.28,72.71 52.86,72.71 53.26,73.1 53.26,74.3 U1.59
N$4
  Top 0.254: R34.2 80.41,55.24 80.41,56.52 80.64,56.75 80.64,57.78 C2.1 81.28,57.78 81.36,57.86 81.36,60.25 | C1.1 81.28,60.33 81.36,60.25 | DC1.4 81.44,60.33 81.36,60.25
N$5
  Top 0.254: Q3.3 41.27,40.88 41.2,40.8 37.86,40.8 37.7,40.64 37.7,39.37 R4.1 37.7,39.29 37.7,38.1 37.78,38.02 38.58,38.02 38.89,37.7 41.04,37.7 41.12,37.78 42.31,37.78 Q4.1
N$6
  Top 0.254: C18.1 80.64,62.87 80.64,63.74 80.25,64.14 80.25,65.41 R5.1 80.25,65.48 80.25,66.04 83.82,66.04 DC1.2
N$7
  Top 0.254: 39.13,33.02 C4.2 | 39.13,33.02 38.73,33.42 37.47,33.42 R10.1 | ST3.2 39.05,30.8 39.05,32.94 39.13,33.02
N$8
  Top 0.254: R32.2 116.2,54.21 112.39,54.21 OK2.1
N$9
  Top 0.254: R7.1 44.85,41.91 44.85,45.09 Q5.3 43.58,45.09 42.7,45.96 42.7,46.51 42.78,46.59 42.78,48.58 43.42,49.21 Q6.1
N$10
  Top 0.254: R96.1 28.81,36.83 28.81,35.24 R94.2 28.57,35.16 29.92,35.16 30.32,35.56 C94.2 32.15,35.56 32.15,36.51 32.23,36.59 34.45,36.59 34.69,36.83 34.69,38.26 34.61,38.34 | Q32.3 32.31,38.73 32.46,38.58 32.54,38.58 32.62,38.66 34.29,38.66 34.61,38.34 | Q12.1 30.08,44.13 30.4,43.81 30.4,43.1 30.48,43.02 31.59,43.02 31.75,43.18 32.07,43.18 32.23,43.34 32.54,43.34 32.7,43.18 33.02,43.18 34.69,41.51 34.69,38.42 34.61,38.34
N$11
  Top 0.254: R1.1 37.7,36.83 37.7,35.24 R10.2 37.47,35.16 38.81,35.16 39.21,35.56 C3.2 41.04,35.56 41.04,36.51 41.12,36.59 43.34,36.59 43.58,36.83 43.58,38.26 43.5,38.34 | Q4.3 41.2,38.73 41.35,38.58 41.43,38.58 41.51,38.66 43.18,38.66 43.5,38.34 | Q1.1 37.94,44.13 38.97,44.13 39.29,43.81 39.29,43.1 39.37,43.02 40.48,43.02 40.64,43.18 40.96,43.18 41.12,43.34 41.43,43.34 41.59,43.18 41.91,43.18 43.58,41.51 43.58,38.42 43.5,38.34
N$12
  Top 0.254: Q7.3 50.16,40.88 50.09,40.8 46.91,40.8 46.59,40.48 46.59,39.37 R9.1 46.59,39.29 46.59,38.1 46.67,38.02 47.47,38.02 47.78,37.7 49.93,37.7 50.01,37.78 51.2,37.78 Q8.1
N$13
  Top 0.254: 48.02,33.02 C6.2 | 48.02,33.02 47.62,33.42 46.35,33.42 R15.1 | ST4.2 47.94,30.8 47.94,32.94 48.02,33.02
N$14
  Top 0.254: R6.1 46.59,36.83 46.59,35.24 R15.2 46.35,35.16 47.7,35.16 48.1,35.56 C5.2 49.93,35.56 49.93,36.51 50.01,36.59 52.23,36.59 52.47,36.83 52.47,38.26 52.39,38.34 | Q8.3 50.09,38.73 50.24,38.58 50.32,38.58 50.4,38.66 52.07,38.66 52.39,38.34 | Q5.1 46.83,44.13 47.86,44.13 48.18,43.81 48.18,43.1 48.26,43.02 49.37,43.02 49.53,43.18 49.85,43.18 50.01,43.34 50.32,43.34 50.48,43.18 50.8,43.18 52.47,41.51 52.47,38.42 52.39,38.34
N$15
  Top 0.254: 56.91,33.02 C8.2 | 56.91,33.02 56.52,33.42 55.24,33.42 R20.1 | ST5.2 56.83,30.8 56.83,32.94 56.91,33.02
N$16
  Top 0.254: R12.1 53.74,41.91 53.74,45.09 Q9.3 52.47,45.09 51.59,45.96 51.59,46.51 51.67,46.59 51.67,48.58 52.31,49.21 Q10.1
N$17
  Top 0.254: R27.1 100.09,42.55 100.09,45.72 Q22.3 98.74,45.72 98.66,45.8 98.66,50.32 98.82,50.48 99.85,50.48 Q23.1
N$18
  Top 0.254: OK2.4 107.31,44.85 106.05,44.85 105.89,44.69 104.78,44.69 R29.1 104.7,44.69 103.58,44.69 103.5,44.61 103.5,42.23 103.66,42.07 103.66,40.48 104.78,39.37 104.78,39.05 104.93,38.89 104.93,37.86 105.01,37.78 105.81,37.78 Q25.1
N$19
  Top 0.254: Q11.3 59.05,40.88 58.98,40.8 55.8,40.8 55.48,40.48 55.48,39.37 R14.1 55.48,39.29 55.48,38.1 55.56,38.02 56.36,38.02 56.67,37.7 58.82,37.7 58.9,37.78 60.09,37.78 Q13.1
N$20  (via drill 0.3)
  Top 0.61: IC1.1 98.19,82.31 98.19,82.87 C20.1 101.84,82.87 103.66,82.87 103.98,83.19 C22.+ 130.18,83.19 135.1,88.11 136.05,88.11 v136.21,88.27 | v137.64,88.27 137.56,88.34 137.56,88.82 138.43,89.69 139.7,89.69 L1.1
  Bottom 0.61: v136.21,88.27 v137.64,88.27
N$21
  Top 0.254: R11.1 55.48,36.83 55.48,35.24 R20.2 55.24,35.16 56.59,35.16 56.99,35.56 C7.2 58.82,35.56 58.82,36.51 58.9,36.59 61.12,36.59 61.36,36.83 61.36,38.26 61.28,38.34 | Q13.3 58.98,38.73 59.13,38.58 59.21,38.58 59.29,38.66 60.96,38.66 61.28,38.34 | Q9.1 56.75,44.13 57.07,43.81 57.07,43.1 57.15,43.02 58.26,43.02 58.42,43.18 58.74,43.18 58.9,43.34 59.21,43.34 59.37,43.18 59.69,43.18 61.36,41.51 61.36,38.42 61.28,38.34
N$22
  Top 0.254: 65.8,33.02 C10.2 67.71,33.02 67.71,32.07 67.79,31.99 68.9,31.99 69.85,31.04 72.39,31.04 D1.C | 65.8,33.02 65.41,33.42 64.14,33.42 R25.1 | ST6.2 65.41,32.62 65.8,33.02
N$23
  Top 0.254: R17.1 62.63,41.91 62.63,45.09 Q14.3 61.36,45.09 60.48,45.96 60.48,46.51 60.56,46.59 60.56,48.58 61.2,49.21 Q15.1
N$24
  Top 0.254: R16.1 64.37,36.83 64.37,35.24 R25.2 64.14,35.16 65.48,35.16 65.88,35.56 C9.2 67.71,35.56 67.71,36.51 67.94,36.75 70.17,36.75 70.33,36.91 70.33,38.02 70.41,38.1 | Q17.3 67.87,38.73 68.02,38.58 68.1,38.58 68.18,38.66 69.85,38.66 70.17,38.34 | 70.41,38.1 70.17,38.34 | 70.41,38.1 71.04,38.1 71.12,38.02 72.39,38.02 D3.C | Q14.1 64.61,44.13 65.64,44.13 65.96,43.81 65.96,43.1 66.04,43.02 67.15,43.02 67.31,43.18 67.63,43.18 67.79,43.34 68.1,43.34 68.26,43.18 68.58,43.18 70.25,41.51 70.25,38.42 70.17,38.34
N$25
  Top 0.254: 84.22,33.02 C15.2 86.12,33.02 86.12,32.07 86.2,31.99 87.31,31.99 88.27,31.04 90.81,31.04 D5.C | 84.22,33.02 83.82,33.42 82.55,33.42 R30.1 | ST7.2 83.82,32.62 84.22,33.02
N$26
  Top 0.254: Q16.3 67.94,40.88 67.87,40.8 64.69,40.8 64.37,40.48 64.37,39.37 R19.1 64.37,39.29 64.37,38.1 64.45,38.02 65.25,38.02 65.56,37.7 67.71,37.7 67.79,37.78 68.98,37.78 Q17.1
N$27  (via drill 0.3)
  Top 0.254: v63.1,104.62 62.39,105.33 61.75,105.33 61.36,104.93 61.36,104.62 60.88,104.14 60.88,103.5 59.61,102.23 54.13,102.23 53.9,102.47 34.77,102.47 27.86,95.57 27.86,94.93 27.78,94.85 26.67,94.85 R41.1 | v64.14,103.58 66.83,103.58 67.63,104.38 73.34,104.38 75.09,102.63 v75.41,102.63 | v73.98,101.2 73.98,100.25 v75.01,99.22 | v77.39,98.35 77.39,99.62 JP6.1
  Bottom 0.254: v64.14,103.58 v63.1,104.62 | v73.98,101.2 v75.41,102.63 | v75.01,99.22 76.52,99.22 v77.39,98.35
N$28
  Top 0.254: R21.1 82.79,36.83 82.79,35.24 R30.2 82.55,35.16 83.9,35.16 84.3,35.56 C14.2 86.12,35.56 86.12,36.51 86.36,36.75 88.58,36.75 88.74,36.91 88.74,38.02 88.82,38.1 | Q21.3 86.28,38.73 86.44,38.58 86.52,38.58 86.6,38.66 88.27,38.66 88.58,38.34 | 88.82,38.1 88.58,38.34 | 88.82,38.1 89.46,38.1 89.53,38.02 90.81,38.02 D7.C | Q18.1 84.06,44.13 84.38,43.81 84.38,43.1 84.45,43.02 85.57,43.02 85.72,43.18 86.04,43.18 86.2,43.34 86.52,43.34 86.68,43.18 87,43.18 88.66,41.51 88.66,38.42 88.58,38.34
N$29
  Top 0.254: 102.63,33.02 C17.2 104.54,33.02 104.54,32.07 104.62,31.99 105.97,31.99 107.55,30.4 109.22,30.4 D15.C | 102.63,33.02 102.23,33.42 100.97,33.42 R33.1 | ST8.2 102.23,32.62 102.63,33.02
N$30
  Top 0.254: R22.1 81.04,41.91 81.04,45.09 Q18.3 79.61,45.09 78.98,45.72 78.98,48.42 79.77,49.21 80.8,49.21 Q19.1
N$31
  Top 0.254: 101.84,38.5 101.84,38.58 101.92,38.66 102.39,38.66 102.47,38.73 Q25.3 | 101.84,38.5 101.84,37.47 R26.1 101.84,37.39 101.84,35.16 | Q22.1 102,44.77 101.2,44.77 101.12,44.69 101.12,43.42 100.97,43.26 100.97,41.83 101.28,41.51 101.28,41.04 100.97,40.72 100.97,39.29 101.76,38.5 101.84,38.5 | 101.84,35.16 102.31,35.16 102.71,35.56 C16.2 104.54,35.56 104.54,36.51 104.62,36.59 106.84,36.59 107.63,37.39 109.22,37.39 D17.C | 101.84,35.16 100.97,35.16 R33.2
N$32  (via drill 0.3)
  Top 0.254: v62.07,104.62 61.36,103.9 61.36,103.27 59.85,101.76 53.9,101.76 53.66,102 35,102 30.4,97.39 30.4,94.93 30.32,94.85 29.21,94.85 R42.1 | v63.1,105.65 64.77,105.65 64.93,105.81 75.09,105.81 v75.33,106.05 | v77.47,103.9 78.26,103.9 78.74,103.43 78.74,101.92 78.98,101.68 78.98,101.36 80.01,100.33 JP6.3
  Bottom 0.254: v63.1,105.65 v62.07,104.62 | v77.47,103.9 v75.33,106.05
N$33
  Top 0.254: Q20.3 86.36,40.88 85.65,40.16 82.79,40.16 82.79,39.37 R24.1 82.79,39.29 82.79,38.1 82.87,38.02 83.66,38.02 83.98,37.7 86.12,37.7 86.2,37.78 87.39,37.78 Q21.1
N$34
  Top 0.406: JP1.1 140.97,73.58 140.81,73.74 139.7,73.74 D31.2
N$35
  Top 0.254: D15.A D16.A
N$36
  Top 0.254: D17.A 109.22,41.35 113.67,41.35 D18.A
N$37
  Top 0.254: C24.2 119.38,33.02 119.46,33.1 119.46,33.42 120.02,33.42 R35.1 120.09,33.42 120.65,33.42 | JP3.3 120.65,33.42 | 120.65,33.42 121.05,33.42 121.13,33.5 121.13,36.12 119.22,38.02 118.11,38.02 D19.C
N$38
  Top 0.254: R35.2 120.02,35.16 119.46,35.16 119.46,35.48 119.38,35.56 C23.2 117.71,35.56 117.71,36.04 117.08,36.67 116.92,36.67 116.6,36.99 116.6,44.77 116.84,45.01 118.11,45.01 D21.C 118.19,45.01 119.62,45.01 122.08,47.47 123.98,47.47 124.54,48.02 124.54,53.42 124.46,53.5 IC12.13 124.46,55.96 124.14,56.28 122.87,56.28 119.38,59.77 IC12.8
N$39
  Top 0.254: D19.A 118.11,41.99 122.56,41.99 D20.A
N$40
  Top 0.254: D21.A 118.11,48.97 122.56,48.97 D22.A
N$41
  Top 0.254: 123.19,33.42 123.67,33.42 123.9,33.66 C26.2 124.86,33.66 124.86,32.7 124.94,32.62 127,32.62 127.71,33.34 127.71,38.02 127,38.02 D23.C | 123.19,33.42 122.56,33.42 R36.1 | JP3.2 123.19,33.42
N$42
  Top 0.254: 138.43,33.66 C28.2 | 138.43,33.66 138.51,33.73 138.51,34.05 139.06,34.05 R37.1 | JP4.3 138.43,33.66
N$43
  Top 0.254: D23.A 127,41.99 131.44,41.99 D24.A
N$44
  Top 0.254: D25.A 127,48.97 131.44,48.97 D26.A
N$45
  Top 0.254: IC12.3 125.73,61.99 126.13,62.39 C64.1
N$46
  Top 0.254: IC12.1 128.27,61.99 127.87,62.39 C64.2
N$47
  Top 0.254: IC12.4 124.46,62.07 124.7,62.31 C65.2
N$48
  Top 0.254: IC12.5 123.19,62.07 122.95,62.31 C65.1
N$49
  Top 0.254: IC12.2 127,59.61 127.79,58.82 C58.1
N$50
  Top 0.254: IC12.6 121.92,61.99 121.52,62.39 C57.2
N$51
  Top 0.254: OK4.4 122.56,67.07 121.28,67.07 118.51,64.29 118.51,59.37 118.59,59.29 119.14,59.29 121.92,56.52 IC12.11 121.92,53.74 121.84,53.66 120.73,53.66 120.65,53.74 IC12.10
N$52  (via drill 0.3)
  Top 0.254: v114.14,56.36 113.9,56.12 111.2,56.12 110.97,56.36 110.97,57.47 110.89,57.55 109.86,57.55 OK3.2 | v115.17,55.32 117.16,55.32 118.51,53.98 118.51,53.26 118.59,53.18 122.87,53.18 123.19,53.5 IC12.12
  Bottom 0.254: v115.17,55.32 v114.14,56.36
N$53  (via drill 0.3)
  Top 0.254: C27.2 138.43,36.2 138.51,36.12 138.51,35.8 139.06,35.8 R37.2 139.14,35.8 139.7,35.8 139.7,48.1 131.84,55.96 131.84,65.56 126.21,71.2 122.63,71.2 122.56,71.28 121.52,71.28 120.97,70.72 111.68,70.72 110.49,71.91 IC2.13 110.49,74.37 v109.93,74.93 | IC2.8 105.41,78.18 107.63,75.96 v108.9,75.96
  Bottom 0.254: v109.93,74.93 v108.9,75.96
N$54
  Top 0.254: 125.33,35.56 125.33,35.08 124.94,34.69 123.59,34.69 123.19,35.08 123.19,35.16 122.56,35.16 R36.2 | C25.2 125.33,35.56 | 125.89,45.01 127,45.01 D25.C | 125.89,45.01 125.02,45.88 125.02,52.78 125.73,53.5 IC12.14 | 125.33,35.56 125.33,44.45 125.89,45.01
N$55  (via drill 0.3)
  Top 0.254: v50.8,99.85 50.56,100.09 48.9,100.09 44.61,95.81 44.61,95.17 44.29,94.85 43.18,94.85 R43.1 | v51.91,100.81 52.15,101.04 53.18,101.04 53.9,100.33 64.29,100.33 67.87,103.9 73.1,103.9 76.04,100.97 78.66,100.97 78.74,100.89 78.74,98.42 v80.33,96.84 | v81.36,95.81 81.36,96.12 81.76,96.52 81.76,98.9 JP6.5
  Bottom 0.254: v50.8,99.85 51.75,100.81 v51.91,100.81 | v81.36,95.81 v80.33,96.84
N$56  (via drill 0.3)
  Top 0.254: v79.61,96.12 78.58,96.12 76.2,98.5 76.2,100.09 72.87,103.43 68.1,103.43 64.53,99.85 52.94,99.85 47.94,94.85 45.72,94.85 R44.1 | v80.64,95.09 81.68,95.09 82.07,95.49 82.07,96.12 82.23,96.28 82.23,96.84 JP6.7
  Bottom 0.254: v80.64,95.09 v79.61,96.12
N$57
  Top 0.254: C30.2 141.6,33.66 141.53,33.73 141.53,34.05 140.97,34.05 R38.1 140.89,34.05 140.49,34.05 140.49,30.96 JP4.2
N$58
  Top 0.254: JP6.9 87.63,94.3 87,93.66 85.65,93.66 85.57,93.58 80.49,93.58 80.09,93.98 71.2,93.98 70.8,93.58 69.06,93.58 67.79,94.85 60.96,94.85 R45.1
N$59  (via drill 0.3)
  Top 0.254: v75.49,91.2 75.49,91.44 74.53,92.39 71.2,92.39 70.64,93.11 68.82,93.11 67.55,94.38 62.07,94.38 61.67,93.98 60.25,93.98 59.85,94.38 59.85,94.54 59.53,94.85 58.42,94.85 R46.1 | v78.03,90.33 78.34,90.65 81.12,90.65 81.68,91.2 83.42,91.2 v83.82,90.81 | v85.96,92.95 86.2,93.19 87.23,93.19 88.11,94.06 88.11,97.63 JP6.11
  Bottom 0.254: v75.49,91.2 77.15,91.2 v78.03,90.33 | v85.96,92.95 v83.82,90.81
N$60
  Top 0.254: IC2.3 111.76,80.49 112.08,80.8 112.71,80.8 112.79,80.88 C31.1
N$61
  Top 0.254: IC2.1 114.3,80.49 114.54,80.72 C31.2
N$62
  Top 0.254: IC2.4 110.49,80.49 110.73,80.72 C32.2
N$63
  Top 0.254: IC2.5 109.22,80.49 108.98,80.72 C32.1
N$64
  Top 0.254: IC2.2 113.03,78.03 113.35,77.71 115.09,77.71 115.25,77.87 C33.1
N$65
  Top 0.254: IC2.6 107.95,80.49 107.63,80.8 107,80.8 106.92,80.88 C34.2
N$66  (via drill 0.3)
  Top 0.254: IC2.10 106.68,74.22 106.76,74.3 107.87,74.3 107.95,74.22 IC2.11 107.95,71.44 111.28,68.1 111.28,66.99 111.36,66.91 111.92,66.91 OK3.4 112.39,66.91 112,66.91 v112,64.61 | v60.96,54.05 61.2,54.29 61.2,54.93 59.61,56.52 59.61,59.05 U1.30 | v62.39,52.63 62.39,52.94 63.26,53.82 65.56,53.82 69.77,58.02 v71.2,58.02 | v72.87,56.91 73.1,56.67 76.2,56.67 79.45,53.42 v79.45,53.1 | v80.49,54.13 80.88,54.13 81.28,54.53 81.28,55.96 82.23,56.91 87.39,56.91 90.57,60.09 90.57,61.91 90.96,62.31 92.95,62.31 96.44,58.82 100.89,58.82 101.12,58.58 101.76,58.58 105.41,62.23 108.19,62.23 108.51,62.55 109.62,62.55 110.65,63.58 v110.97,63.58
  Bottom 0.254: v62.39,52.63 v60.96,54.05 | v71.2,58.02 71.75,58.02 v72.87,56.91 | v80.49,54.13 v79.45,53.1 | v112,64.61 v110.97,63.58
N$67  (via drill 0.3)
  Top 0.254: v117,104.78 117,105.09 114.86,107.24 77.55,107.24 75.64,105.33 65.17,105.33 65.01,105.17 64.69,105.17 63.42,103.9 62.71,103.9 60.09,101.28 53.66,101.28 53.42,101.52 38.34,101.52 35.72,98.9 35.72,90.49 35.8,90.41 35.8,88.19 33.02,85.41 33.02,74.45 34.77,72.71 34.77,69.85 34.45,69.53 34.45,67.87 42.62,59.69 48.1,59.69 48.74,60.33 60.33,60.33 60.48,60.17 60.48,59.05 U1.31 | v118.03,105.81 119.06,105.81 119.46,105.41 119.46,104.78 126.6,97.63 132.08,97.63 133.11,96.6 137.48,96.6 138.27,97.39 140.1,97.39 140.81,98.11 143.11,98.11 143.75,97.47 143.75,88.9 142.4,87.55 139.62,87.55 138.67,86.6 v138.67,86.28 | v137.64,87.31 137,87.31 136.68,87 135.65,87 126.36,77.71 126.29,77.71 125.49,77.63 | 125.49,77.63 125.49,76.44 125.09,76.44 OK4.2 | IC2.12 109.22,75.25 110.17,76.2 113.74,76.2 114.38,75.56 116.6,75.56 118.75,77.71 126.13,77.71 125.49,77.63
  Bottom 0.254: v118.03,105.81 v117,104.78 | v137.64,87.31 v138.67,86.28
N$68
  Top 0.254: C29.2 142.16,36.2 142.16,35.88 142.08,35.8 140.97,35.8 R38.2 140.89,35.8 140.18,35.8 140.18,48.34 132.32,56.2 132.32,65.8 126.44,71.68 122.87,71.68 122.79,71.75 121.28,71.75 120.73,71.2 115.81,71.2 115.17,71.83 115.17,74.61 115.09,74.69 112.08,74.69 111.76,74.37 IC2.14
N$69  (via drill 0.3)
  Top 0.254: v78.26,94.69 78.11,94.85 76.83,94.85 R47.1 | v78.26,93.27 78.26,92.15 78.34,92.08 80.41,92.08 80.96,92.63 84.45,92.63 87.07,90.01 v87.15,90.01 | v88.19,91.04 88.74,91.6 88.74,92 v90.41,93.66 | v91.44,94.69 91.2,94.93 91.2,96.12 91.12,96.2 91.12,97.47 91.92,98.27 91.92,98.9 JP6.13
  Bottom 0.254: v78.26,93.27 v78.26,94.69 | v88.19,91.04 v87.15,90.01 | v91.44,94.69 v90.41,93.66
N$70
  Top 0.254: R39.1 104.78,56.75 105.89,56.75 105.97,56.83 105.97,57.47 106.05,57.55 107.31,57.55 OK3.1
N$71
  Top 0.254: R40.1 131.44,76.44 127.64,76.44 OK4.1
N$72  (via drill 0.3)
  Top 0.254: v97.55,102.55 97.23,102.55 95.01,104.78 91.84,104.78 91.44,104.38 91.44,101.6 91.04,101.2 90.73,101.2 90.49,100.97 81.36,100.97 81.28,100.89 81.28,96.76 79.38,94.85 R48.1 | v96.52,101.52 96.52,100.97 JP6.15
  Bottom 0.254: v96.52,101.52 v97.55,102.55
N$73
  Top 0.254: JP6.16 93.98,100.97 93.98,95.01 94.14,94.85 95.25,94.85 R49.1
N$74
  Top 0.254: JP6.14 92.71,102.16 91.44,100.89 91.44,98.5 90.65,97.71 90.65,95.96 90.73,95.89 90.73,94.38 91.52,93.58 94.14,93.58 94.54,93.98 95.96,93.98 96.36,94.38 96.36,94.54 96.68,94.85 97.79,94.85 R50.1
N$75  (via drill 0.3)
  Top 0.254: v101.84,99.85 106.84,94.85 111.76,94.85 R51.1 | v100.81,100.89 100.17,100.89 v99.77,101.28 | v98.74,102.31 98.27,102.79 98.27,102.87 97.87,103.27 97.23,103.27 95.25,105.25 91.6,105.25 90.96,104.62 90.96,103.03 JP6.12
  Bottom 0.254: v100.81,100.89 v101.84,99.85 | v98.74,102.31 v99.77,101.28
N$76  (via drill 0.3)
  Top 0.254: v115.25,103.03 115.25,94.93 115.17,94.85 114.3,94.85 R52.1 | v116.28,104.06 116.28,105.09 114.62,106.76 97.55,106.76 v96.52,105.73 | v94.38,103.58 94.14,103.82 93.27,103.82 v93.03,103.58 | v90.25,103.58 88.98,103.58 JP6.10
  Bottom 0.254: v116.28,104.06 v115.25,103.03 | v94.38,103.58 v96.52,105.73 | v93.03,103.58 92.71,103.58 92.47,103.35 92.23,103.35 92.15,103.27 91.6,103.27 91.28,103.58 v90.25,103.58
N$77  (via drill 0.3)
  Top 0.254: v76.2,106.92 76.52,106.92 77.31,107.71 115.09,107.71 126.68,96.12 128.27,96.12 R53.1 | v77.71,105.65 77.95,105.41 81.92,105.41 JP6.8
  Bottom 0.254: v76.2,106.92 76.44,106.92 v77.71,105.65
N$78  (via drill 0.3)
  Top 0.254: v77.55,92 77.95,91.6 80.64,91.6 81.2,92.15 84.22,92.15 86.44,89.93 86.44,89.69 86.84,89.3 88.19,89.3 89.06,88.42 90.01,88.42 91.36,87.07 94.93,87.07 95.17,86.84 95.49,86.84 96.04,86.28 96.6,86.28 97.39,85.49 102.08,85.49 103.27,84.3 117.4,84.3 118.27,85.17 118.27,85.8 125.81,93.34 129.3,93.34 129.46,93.5 129.46,95.89 129.7,96.12 130.81,96.12 R54.1 | v75.72,94.69 75.72,99.85 75.01,100.57 v74.69,100.57 | v76.12,102 76.12,103.58 77.47,104.93 81.68,104.93 82.55,104.06 JP6.6
  Bottom 0.254: v77.55,92 77.55,92.87 v75.72,94.69 | v76.12,102 v74.69,100.57
N$79  (via drill 0.3)
  Top 0.254: v118.75,105.09 118.75,104.78 126.36,97.16 131.84,97.16 132.87,96.12 139.06,96.12 R55.1 | v117.71,104.06 117.32,104.06 116.6,103.35 115.97,103.35 114.86,104.46 114.86,105.09 114.14,105.81 104.38,105.81 v102.08,103.5 | v101.04,102.47 99.93,102.47 99.06,101.6 97.47,101.6 94.77,104.3 92.39,104.3 v92.15,104.06 | v90.73,105.49 90.41,105.81 83.74,105.81 v83.19,105.25 | v81.76,103.82 81.6,103.82 JP6.4
  Bottom 0.254: v117.71,104.06 v118.75,105.09 | v101.04,102.47 v102.08,103.5 | v90.73,105.49 v92.15,104.06 | v81.76,103.82 v83.19,105.25
N$80  (via drill 0.3)
  Top 0.254: v142.56,89.53 142.8,89.77 142.8,96.04 142.72,96.12 141.6,96.12 R56.1 | v143.99,88.11 143.99,88.42 144.22,88.66 144.22,97.71 143.35,98.58 140.57,98.58 139.86,97.87 138.03,97.87 137.24,97.08 133.35,97.08 132.32,98.11 126.84,98.11 119.94,105.01 119.94,105.65 119.3,106.28 118.59,106.28 118.35,106.52 v117.32,106.52 | v115.57,104.78 115.57,105.09 114.38,106.28 97.79,106.28 97.55,106.05 v97.55,105.73 | v94.22,105.97 93.9,106.28 82.87,106.28 v82.47,105.89 | v80.8,104.22 80.57,104.46 79.69,104.46 v79.22,103.98
  Bottom 0.254: v143.99,88.11 v142.56,89.53 | v115.57,104.78 v117.32,106.52 | v97.55,105.73 96.84,106.44 94.69,106.44 v94.22,105.97 | v80.8,104.22 v82.47,105.89 | JP6.2 v79.22,103.98
N$81  (via drill 0.3)
  Top 0.254: v32.62,86.04 32.54,86.12 32.54,90.17 30.64,92.08 28.18,92.08 27.86,92.39 27.86,93.03 27.78,93.11 26.67,93.11 R41.2 | v34.21,84.45 34.85,84.45 45.01,74.3 45.88,74.3 46.35,73.82 v47.39,73.82 | v49.85,72.95 50.8,72.95 50.88,73.03 50.88,74.3 U1.62
  Bottom 0.254: v34.21,84.45 v32.62,86.04 | v47.39,73.82 48.97,73.82 v49.85,72.95
N$82  (via drill 0.3)
  Top 0.254: v33.26,86.76 33.02,87 33.02,90.41 30.32,93.11 29.21,93.11 R42.2 | v34.69,85.33 45.24,74.77 v46.43,74.77 | v47.47,75.8 47.7,75.8 v48.9,76.99 | v49.93,75.96 49.93,75.64 50.01,75.56 50.01,74.3 U1.63
  Bottom 0.254: v34.69,85.33 v33.26,86.76 | v47.47,75.8 v46.43,74.77 | v49.93,75.96 v48.9,76.99
N$83
  Top 0.254: R43.2 43.18,93.11 43.89,93.11 44.53,93.74 44.77,93.74 45.01,93.98 46.43,93.98 50.96,89.46 50.96,79.45 50.09,78.58 50.09,77.15 49.21,76.28 49.21,74.3 U1.64
N$84  (via drill 0.3)
  Top 0.254: v40.16,80.96 40.16,82.71 44.29,86.84 44.29,92.79 44.61,93.11 45.72,93.11 R44.2 | v38.73,79.53 39.05,79.53 43.42,75.17 v43.42,73.5 | v44.61,72.63 44.85,72.39 46.04,72.39 46.35,72.71 47.62,72.71 U1.1
  Bottom 0.254: v38.73,79.53 v40.16,80.96 | v43.42,73.5 43.74,73.5 v44.61,72.63
N$85  (via drill 0.3)
  Top 0.254: v52.86,98.74 52.94,98.74 57.71,93.98 59.13,93.98 59.37,93.74 59.61,93.74 60.25,93.11 60.96,93.11 R45.2 | v51.83,99.77 51.51,100.09 51.51,100.17 50.64,101.04 38.58,101.04 36.2,98.66 36.2,90.73 36.27,90.65 36.27,87.95 33.5,85.17 33.5,74.69 35.24,72.95 35.24,72.15 36.75,70.64 38.89,70.64 40.16,71.91 47.62,71.91 U1.2
  Bottom 0.254: v51.83,99.77 v52.86,98.74
N$86  (via drill 0.3)
  Top 0.254: v60.17,84.3 59.85,84.61 59.85,92.79 59.53,93.11 58.42,93.11 R46.2 | v59.13,83.26 59.13,79.53 58.74,79.14 57.23,79.14 56.12,78.03 56.12,75.88 v56.36,75.64 | v53.98,72.95 53.82,72.95 53.1,72.23 51.51,72.23 51.28,71.99 50.64,71.99 50.4,71.75 49.61,71.75 48.9,71.04 47.62,71.04 U1.3
  Bottom 0.254: v59.13,83.26 v60.17,84.3 | v56.36,75.64 56.36,75.33 v53.98,72.95
N$87  (via drill 0.3)
  Top 0.254: v75.72,93.11 76.83,93.11 R47.2 | v74.22,91.6 74.22,86.2 68.42,80.41 64.77,80.41 v64.69,80.49 | v63.26,79.06 61.44,79.06 60.88,78.5 60.88,77.87 61.28,77.47 61.28,75.8 v61.12,75.64 | v59.29,72.95 59.29,72.15 56.83,69.69 50.56,69.69 50.09,70.17 49.05,70.17 48.97,70.25 47.62,70.25 U1.4
  Bottom 0.254: v74.22,91.6 v75.72,93.11 | v63.26,79.06 v64.69,80.49 | v61.12,75.64 61.12,74.77 v59.29,72.95
N$88  (via drill 0.3)
  Top 0.254: v65.48,104.62 65.72,104.85 75.88,104.85 77.79,106.76 94.46,106.76 97.47,103.74 98.11,103.74 98.66,103.19 101.36,103.19 101.76,102.79 101.76,100.81 101.12,100.17 101.12,94.38 98.82,92.08 97.31,92.08 94.77,89.53 94.46,89.53 93.5,88.58 90.57,88.58 90.25,88.9 89.3,88.9 87.47,90.73 87.07,90.73 84.69,93.11 79.38,93.11 R48.2 | v63.74,106.36 62.07,106.36 60.88,105.17 60.88,104.85 60.4,104.38 60.4,103.74 59.37,102.71 54.37,102.71 54.13,102.95 34.53,102.95 27.46,95.89 25.64,95.89 25.56,95.81 25.56,92.15 25.64,92.08 27.46,92.08 27.94,91.6 30.4,91.6 32.07,89.93 32.07,86.52 31.91,86.36 31.91,74.85 34.29,72.47 34.29,70.09 33.97,69.77 33.97,67.31 v34.13,67.15 | v35.16,68.18 37.39,68.18 v38.1,68.9 | v39.13,69.93 39.13,70.17 40.4,71.44 44.37,71.44 46.35,69.45 47.62,69.45 U1.5
  Bottom 0.254: v63.74,106.36 v65.48,104.62 | v35.16,68.18 v34.13,67.15 | v39.13,69.93 v38.1,68.9
N$89  (via drill 0.3)
  Top 0.254: v88.98,90.25 88.98,91.12 89.22,91.36 89.22,91.76 90.41,92.95 90.73,92.95 90.88,93.11 95.25,93.11 R49.2 | v87.31,88.58 87.07,88.82 86.6,88.82 85.96,89.46 85.96,89.69 83.98,91.68 81.44,91.68 80.88,91.12 77.79,91.12 77.31,90.65 77.31,89.06 v77.55,88.82 | v75.49,86.76 68.66,79.93 67.07,79.93 62.39,75.25 v62.07,75.25 | v60.33,72.95 60.33,72.47 57.07,69.22 49.53,69.22 48.97,68.66 47.62,68.66 U1.6
  Bottom 0.254: v87.31,88.58 v88.98,90.25 | v75.49,86.76 v77.55,88.82 | v62.07,75.25 62.07,74.69 v60.33,72.95
N$90  (via drill 0.3)
  Top 0.254: v89.69,89.61 89.93,89.38 90.49,89.38 90.81,89.06 93.27,89.06 94.22,90.01 94.54,90.01 96.6,92.08 96.6,93.03 96.68,93.11 97.79,93.11 R50.2 | v88.27,88.19 88.27,79.22 v85.41,76.36 | v84.38,75.33 82.39,73.34 78.03,73.34 77.71,73.66 77.71,73.98 v76.99,74.69 | v75.41,74.69 75.09,74.69 74.77,75.01 64.29,75.01 63.1,73.82 v63.1,73.5 | v61.52,71.91 61.2,71.91 55.8,66.52 53.5,66.52 52.55,67.63 51.99,68.26 49.29,68.26 48.9,67.87 U1.7
  Bottom 0.254: v88.27,88.19 v89.69,89.61 | v84.38,75.33 v85.41,76.36 | v75.41,74.69 v76.99,74.69 | v61.52,71.91 v63.1,73.5
N$91  (via drill 0.3)
  Top 0.254: v96.6,87.47 96.84,87.47 97.87,86.44 100.41,86.44 107.08,93.11 111.76,93.11 R51.2 | v95.17,86.12 94.69,86.6 91.36,86.6 88.74,83.98 88.74,78.98 87.15,77.39 87.15,75.41 v86.76,75.01 | v85.33,73.58 84.61,72.87 77.79,72.87 v76.99,73.66 | v75.41,73.66 74.53,74.53 64.53,74.53 64.06,74.06 v64.06,73.74 | v62.15,73.74 60.88,72.47 60.88,72.31 56.83,68.26 v53.66,68.26 | v52.23,66.91 51.99,67.07 U1.8
  Bottom 0.254: v96.6,87.47 95.25,86.12 v95.17,86.12 | v85.33,73.58 v86.76,75.01 | v75.41,73.66 v76.99,73.66 | v64.06,73.74 63.9,73.74 63.42,74.22 62.63,74.22 v62.15,73.74 | v53.66,68.26 52.31,66.91 v52.23,66.91
N$92  (via drill 0.3)
  Top 0.254: v94.54,87.79 95.01,88.27 96.84,88.27 97.31,87.79 97.31,87.71 98.11,86.92 100.17,86.92 106.84,93.58 110.65,93.58 111.05,93.98 112.47,93.98 112.87,93.58 112.87,93.42 113.19,93.11 114.3,93.11 R52.2 | v93.11,85.88 92.87,86.12 91.6,86.12 89.3,83.82 89.3,78.82 87.63,77.15 87.63,74.37 v87.55,74.3 | v86.12,72.87 85.65,72.39 77.23,72.39 v76.99,72.63 | v75.41,72.63 74.69,73.34 74.69,73.66 74.3,74.06 65.41,74.06 v65.01,73.66 | v61.52,70.96 60.96,70.96 56.83,66.83 56.83,66.2 55.17,64.53 50.72,64.53 48.97,66.28 U1.9
  Bottom 0.254: v94.54,87.79 94.54,87.31 v93.11,85.88 | v86.12,72.87 v87.55,74.3 | v75.41,72.63 v76.99,72.63 | v65.01,73.66 62.31,70.96 v61.52,70.96
N$93  (via drill 0.3)
  Top 0.254: v95.49,87.55 96.28,86.76 96.84,86.76 97.63,85.96 102.31,85.96 103.5,84.77 117.16,84.77 117.79,85.41 117.79,86.04 126.13,94.38 128.27,94.38 R53.2 | v94.22,85.88 94.22,84.93 95.01,84.14 v95.01,80.88 | v93.9,79.77 93.66,79.53 90.73,79.53 88.11,76.91 88.11,76.2 88.34,75.96 88.34,73.74 v88.19,73.58 | v86.76,72.15 86.12,72.15 85.88,71.91 77.23,71.91 v76.99,71.68 | v75.41,71.68 68.34,71.68 67.31,72.71 v67.31,73.03 | v66.28,71.99 66.04,72.23 64.61,72.23 v64.21,71.83 | v61.52,69.93 60.64,69.93 57.31,66.6 57.31,65.96 55.48,64.06 50.48,64.06 48.97,65.56 48.9,65.48 U1.10